# Allegro board pc049a_toplevel_03.brd
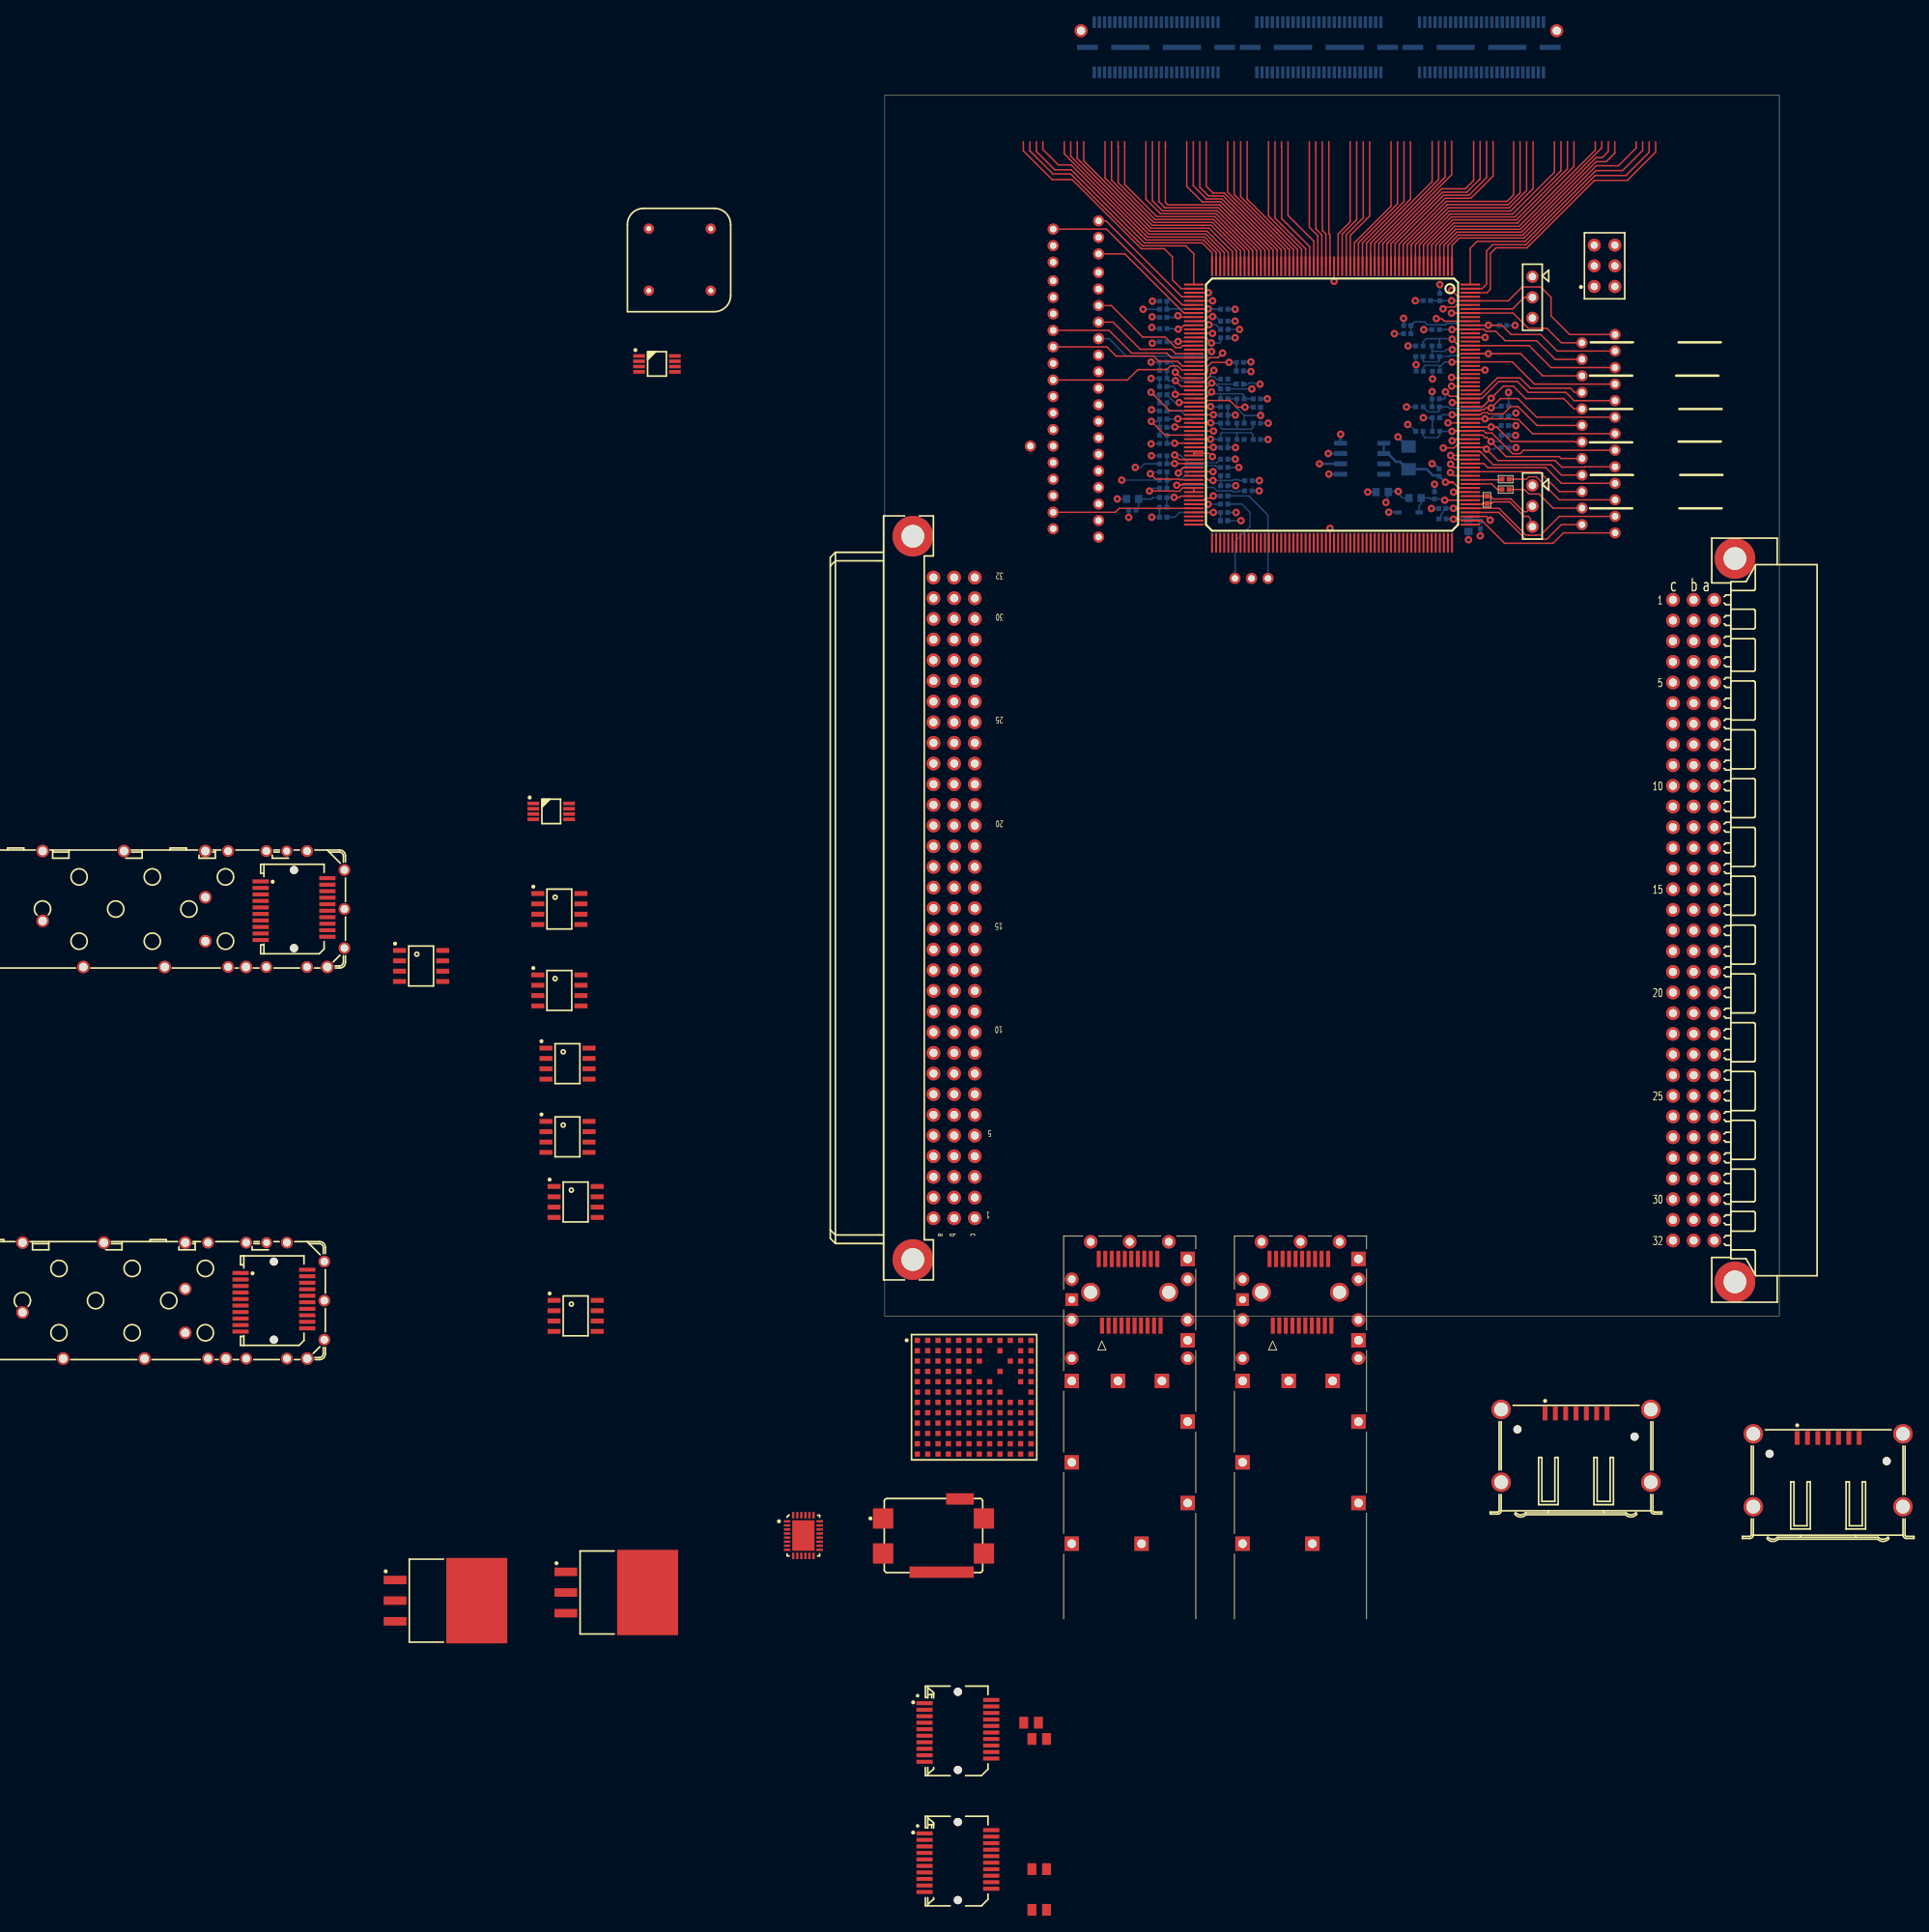
[diagram p0: board, top side]
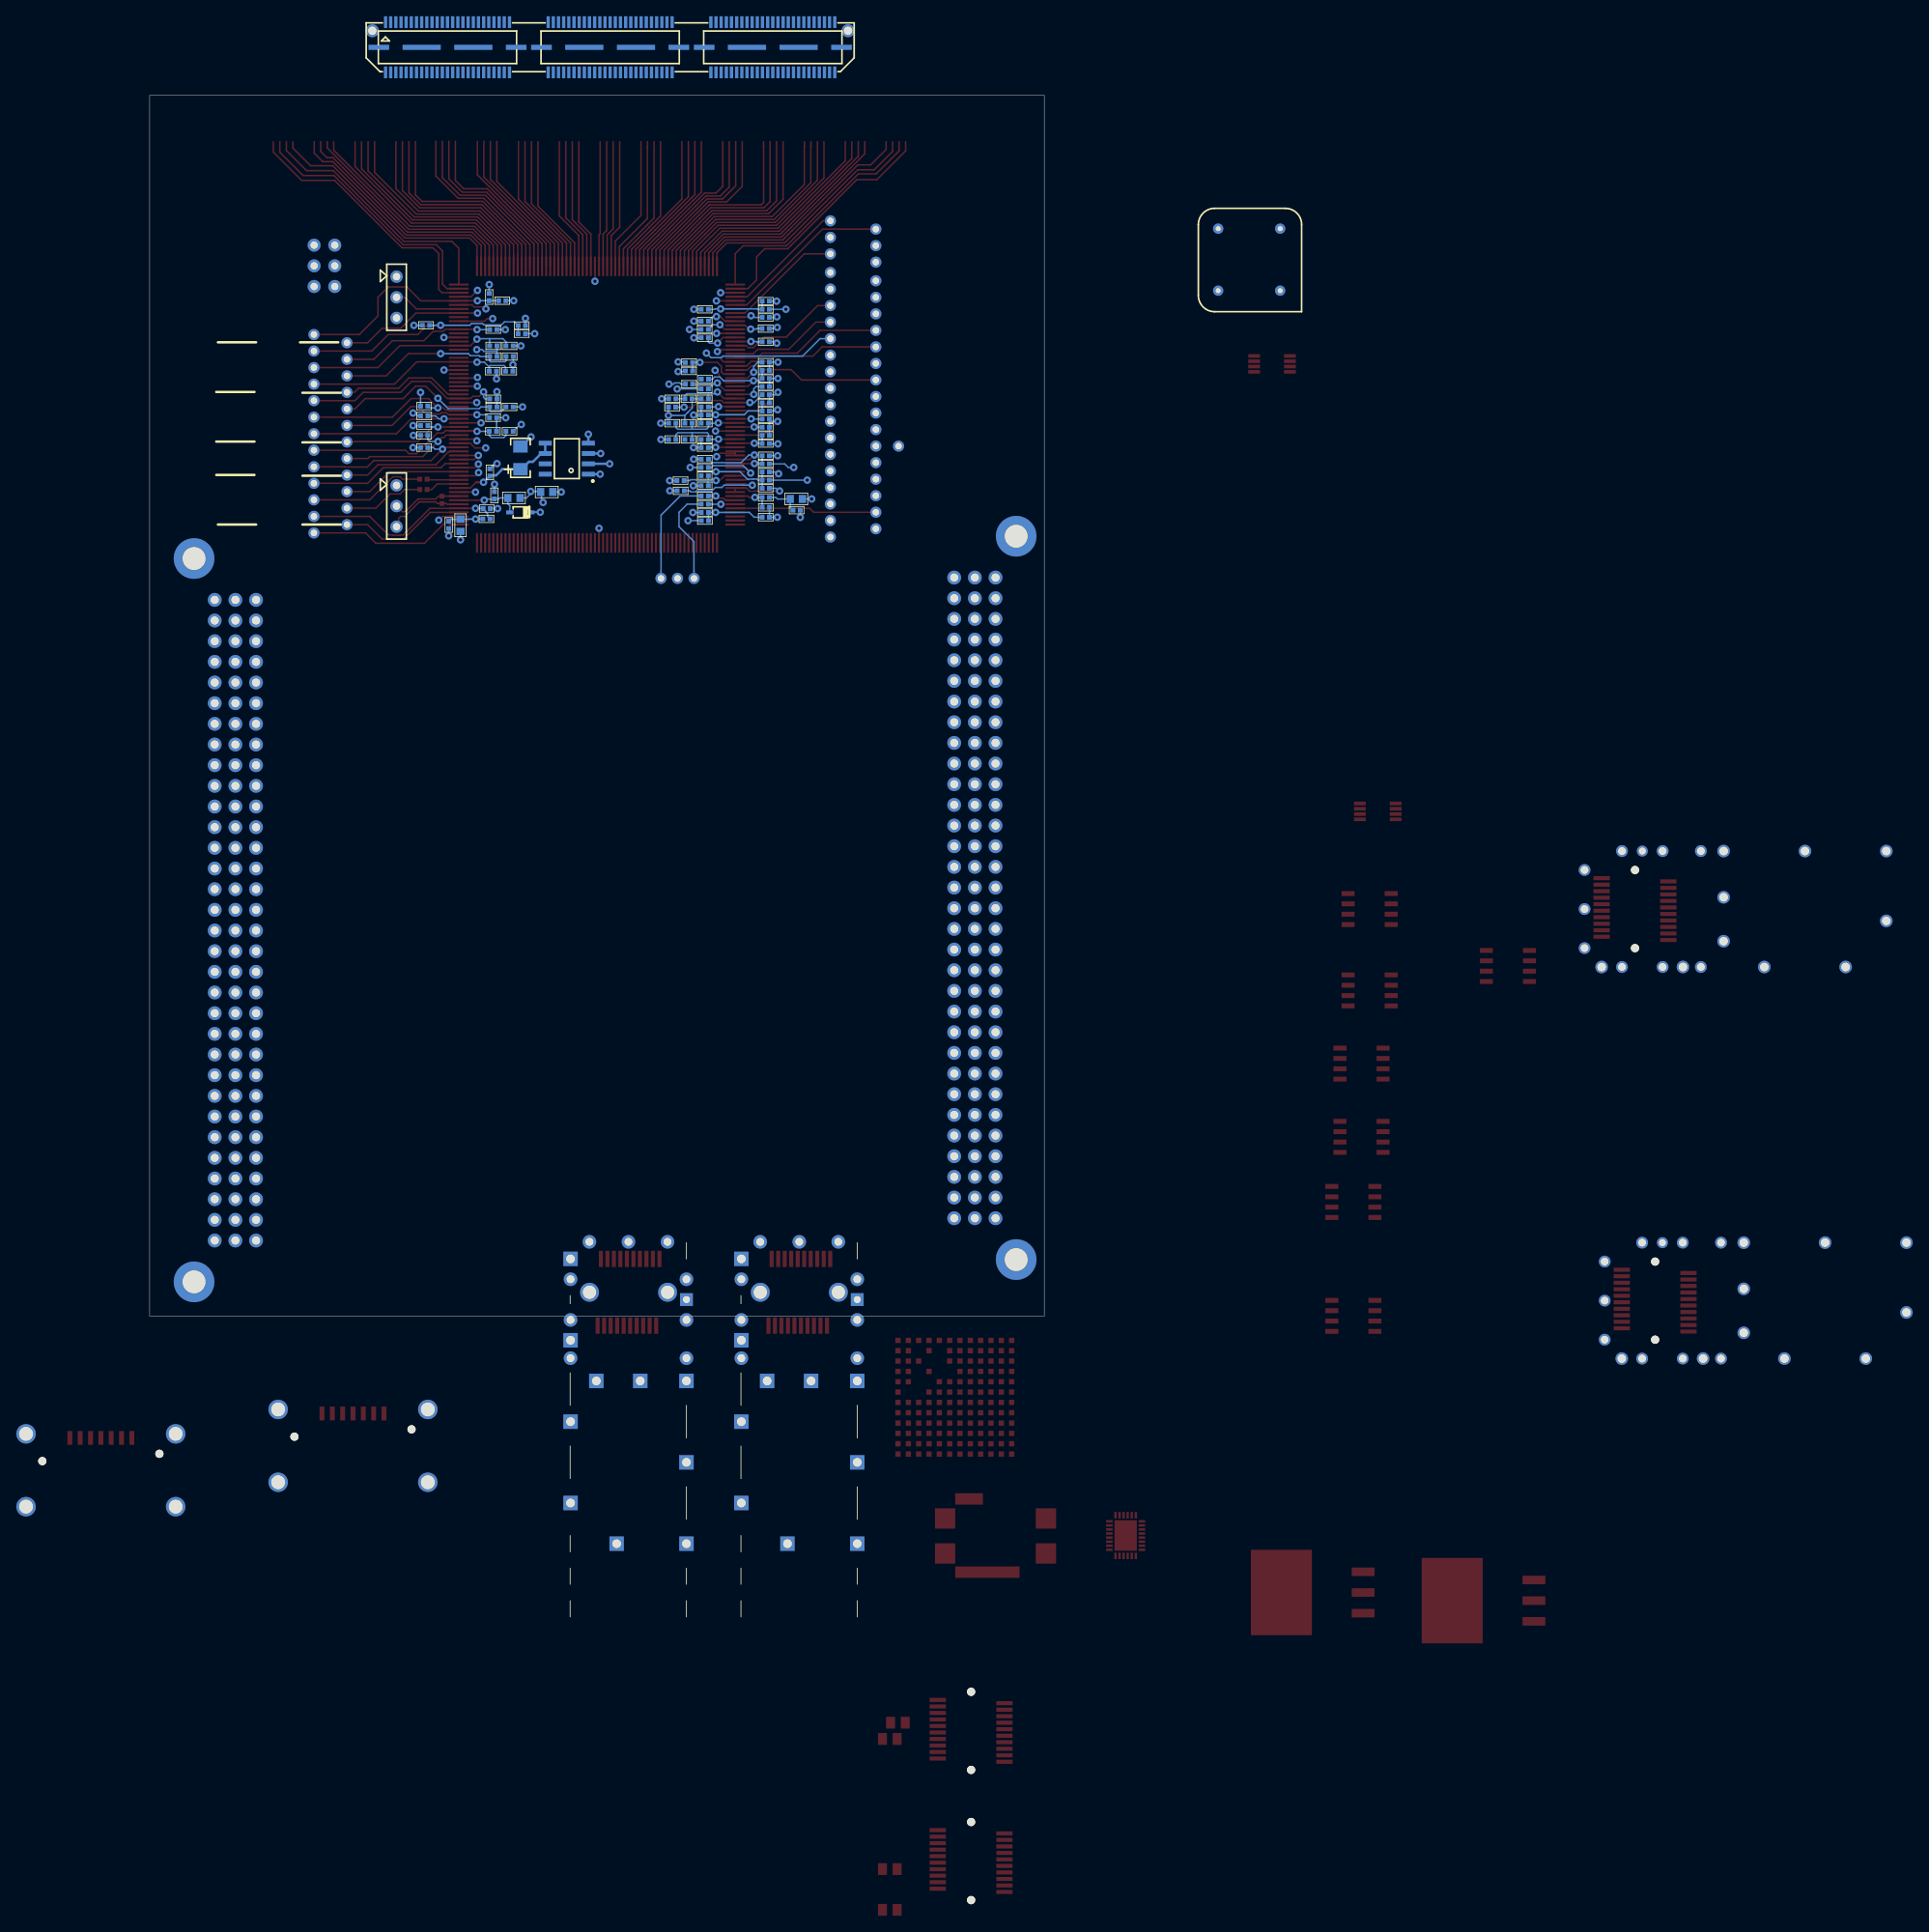
[diagram p1: board, bottom side, seen from below]

Outline 110 x 150 mm; copper layers: TOP, L2, L3, L4, L5, BOTTOM. Coordinates in mm from the lower left corner of the outline.
Outline path: 0,150 110,150 110,0 0,0 0,150

## Design rules (mm)
net group OR: nets OR<0>_1 OR<1>_1
net group ANALOG_TO_MAROC: nets ANALOG_TO_MAROC<0> ANALOG_TO_MAROC<1> ANALOG_TO_MAROC<2> ANALOG_TO_MAROC<3> ANALOG_TO_MAROC<4> ANALOG_TO_MAROC<5> ANALOG_TO_MAROC<6> ANALOG_TO_MAROC<7> ANALOG_TO_MAROC<8> ANALOG_TO_MAROC<9> ANALOG_TO_MAROC<10> ANALOG_TO_MAROC<11> ANALOG_TO_MAROC<12> ANALOG_TO_MAROC<13> ANALOG_TO_MAROC<14> ANALOG_TO_MAROC<15> ANALOG_TO_MAROC<16> ANALOG_TO_MAROC<17> ANALOG_TO_MAROC<18> ANALOG_TO_MAROC<19> ANALOG_TO_MAROC<20> ANALOG_TO_MAROC<21> ANALOG_TO_MAROC<22> ANALOG_TO_MAROC<23> ANALOG_TO_MAROC<24> ANALOG_TO_MAROC<25> ANALOG_TO_MAROC<26> ANALOG_TO_MAROC<27> ANALOG_TO_MAROC<28> ANALOG_TO_MAROC<29> ANALOG_TO_MAROC<30> ANALOG_TO_MAROC<31> ANALOG_TO_MAROC<32> ANALOG_TO_MAROC<33> ANALOG_TO_MAROC<34> ANALOG_TO_MAROC<35> ANALOG_TO_MAROC<36> ANALOG_TO_MAROC<37> ANALOG_TO_MAROC<38> ANALOG_TO_MAROC<39> ANALOG_TO_MAROC<40> ANALOG_TO_MAROC<41> ANALOG_TO_MAROC<42> ANALOG_TO_MAROC<43> ANALOG_TO_MAROC<44> ANALOG_TO_MAROC<45> ANALOG_TO_MAROC<46> ANALOG_TO_MAROC<47> ANALOG_TO_MAROC<48> ANALOG_TO_MAROC<49> ANALOG_TO_MAROC<50> ANALOG_TO_MAROC<51> ANALOG_TO_MAROC<52> ANALOG_TO_MAROC<53> ANALOG_TO_MAROC<54> ANALOG_TO_MAROC<55> ANALOG_TO_MAROC<56> ANALOG_TO_MAROC<57> ANALOG_TO_MAROC<58> ANALOG_TO_MAROC<59> ANALOG_TO_MAROC<60> ANALOG_TO_MAROC<61> ANALOG_TO_MAROC<62> ANALOG_TO_MAROC<63>
net group LVDS_DIN_N: nets LVDS_DIN_N<0> LVDS_DIN_N<1> LVDS_DIN_N<2> LVDS_DIN_N<3> LVDS_DIN_N<4> LVDS_DIN_N<5> LVDS_DIN_N<6> LVDS_DIN_N<7> LVDS_DIN_N<8> LVDS_DIN_N<9> LVDS_DIN_N<10> LVDS_DIN_N<11> LVDS_DIN_N<12> LVDS_DIN_N<13> LVDS_DIN_N<14> LVDS_DIN_N<15>
net group LVDS_DIN_P: nets LVDS_DIN_P<0> LVDS_DIN_P<1> LVDS_DIN_P<2> LVDS_DIN_P<3> LVDS_DIN_P<4> LVDS_DIN_P<5> LVDS_DIN_P<6> LVDS_DIN_P<7> LVDS_DIN_P<8> LVDS_DIN_P<9> LVDS_DIN_P<10> LVDS_DIN_P<11> LVDS_DIN_P<12> LVDS_DIN_P<13> LVDS_DIN_P<14> LVDS_DIN_P<15>
net group LVDS_DOUT_N: nets LVDS_DOUT_N<0> LVDS_DOUT_N<1> LVDS_DOUT_N<2> LVDS_DOUT_N<3> LVDS_DOUT_N<4> LVDS_DOUT_N<5> LVDS_DOUT_N<6> LVDS_DOUT_N<7> LVDS_DOUT_N<8> LVDS_DOUT_N<9> LVDS_DOUT_N<10> LVDS_DOUT_N<11> LVDS_DOUT_N<12> LVDS_DOUT_N<13> LVDS_DOUT_N<14> LVDS_DOUT_N<15>
net group LVDS_DOUT_P: nets LVDS_DOUT_P<0> LVDS_DOUT_P<1> LVDS_DOUT_P<2> LVDS_DOUT_P<3> LVDS_DOUT_P<4> LVDS_DOUT_P<5> LVDS_DOUT_P<6> LVDS_DOUT_P<7> LVDS_DOUT_P<8> LVDS_DOUT_P<9> LVDS_DOUT_P<10> LVDS_DOUT_P<11> LVDS_DOUT_P<12> LVDS_DOUT_P<13> LVDS_DOUT_P<14> LVDS_DOUT_P<15>
net group SUM: nets SUM<1>_1 SUM<2>_1 SUM<3>_1 SUM<4>_1 SUM<5>_1 SUM<6>_1 SUM<7>_1 SUM<8>_1
net group TRIG: nets TRIG<0>_1 TRIG<1>_1 TRIG<2>_1 TRIG<3>_1 TRIG<4>_1 TRIG<5>_1 TRIG<6>_1 TRIG<7>_1 TRIG<8>_1 TRIG<9>_1 TRIG<10>_1 TRIG<11>_1 TRIG<12>_1 TRIG<13>_1 TRIG<14>_1 TRIG<15>_1 TRIG<16>_1 TRIG<17>_1 TRIG<18>_1 TRIG<19>_1 TRIG<20>_1 TRIG<21>_1 TRIG<22>_1 TRIG<23>_1 TRIG<24>_1 TRIG<25>_1 TRIG<26>_1 TRIG<27>_1 TRIG<28>_1 TRIG<29>_1 TRIG<30>_1 TRIG<31>_1 TRIG<32>_1 TRIG<33>_1 TRIG<34>_1 TRIG<35>_1 TRIG<36>_1 TRIG<37>_1 TRIG<38>_1 TRIG<39>_1 TRIG<40>_1 TRIG<41>_1 TRIG<42>_1 TRIG<43>_1 TRIG<44>_1 TRIG<45>_1 TRIG<46>_1 TRIG<47>_1 TRIG<48>_1 TRIG<49>_1 TRIG<50>_1 TRIG<51>_1 TRIG<52>_1 TRIG<53>_1 TRIG<54>_1 TRIG<55>_1 TRIG<56>_1 TRIG<57>_1 TRIG<58>_1 TRIG<59>_1 TRIG<60>_1 TRIG<61>_1 TRIG<62>_1 TRIG<63>_1
net group UNNAMED_9_CAPCERSMDCL2_I30_B: nets UNNAMED_9_CAPCERSMDCL2_I30_B<0>
net group UNNAMED_9_FILTERBNX02_I5_CG: nets GND_SIGNAL
net group UNNAMED_9_LTM4606_I4_DRVCC: nets UNNAMED_9_LTM4606_I4_DRVCC<0>
net group UNNAMED_9_LTM4606_I4_SGND: nets DGND
net group UNNAMED_9_LTM4606_I4_VIN: nets P12V
net group UNNAMED_9_LTM4606_I4_VOUT: nets P1V5

## Placement (name value [footprint] x y rotation side)
C1_1  100nF  [C0402]  68.56 99.22 180 bottom
C2_1  100nF  [C0402]  34.24 99.37 0 bottom
C3_1  100nF  [C0402]  43.67 114.51 180 bottom
C4_1  100nF  [C0402]  68.25 125.21 270 bottom
C5_1  100nF  [C0402]  67.75 119.21 0 bottom
C6_1  100nF  [C0402]  34.25 124.71 0 bottom
C7_1  100nF  [C0402]  67.75 117.91 0 bottom
C8_1  100nF  [C0402]  34.25 123.71 0 bottom
C9_1  100nF  [C0402]  43.68 116.13 180 bottom
C10_1  100nF  [C0402]  67.8 116.1 0 bottom
C11_1  100nF  [C0402]  34.25 108.21 0 bottom
C12_1  100nF  [C0402]  67.75 111.71 0 bottom
C13_1  100nF  [C0402]  34.25 113.21 0 bottom
C14_1  100nF  [C0402]  34.25 105.71 0 bottom
C15_1  100nF  [C0402]  34.25 103.71 0 bottom
C16_1  100nF  [C0402]  67.79 108.72 0 bottom
C17_1  100nF  [C0402]  34.25 101.71 0 bottom
C18_1  100nF  [C0402]  34.25 122.71 0 bottom
C19_1  100nF  [C0402]  41.75 107.71 180 bottom
C20_1  100nF  [C0402]  34.25 119.71 0 bottom
C21_1  100nF  [C0402]  41.75 109.71 180 bottom
C22_1  100nF  [C0402]  34.25 114.21 0 bottom
C23_1  100nF  [C0402]  67.77 110.39 0 bottom
C24_1  100nF  [C0402]  34.25 116.21 0 bottom
C25_1  100nF  [C0402]  76.25 106.71 180 bottom
C26_1  100nF  [C0402]  34.25 109.21 0 bottom
C27_1  100nF  [C0402]  41.75 111.71 180 bottom
C28_1  100nF  [C0402]  41.75 120.21 180 bottom
C29_1  100nF  [C0402]  41.75 112.71 0 bottom
C30_1  100nF  [C0402]  41.75 104.27 180 bottom
C31_1  100nF  [C0402]  76.25 111.81 180 bottom
C32_1  100nF  [C0402]  41.75 122.26 180 bottom
C33_1  100nF  [C0402]  41.75 110.71 180 bottom
C34_1  100nF  [C0402]  44.73 102.65 180 bottom
C35_1  100nF  [C0402]  67.75 112.71 0 bottom
C36_1  100nF  [C0402]  41.76 121.23 180 bottom
C37_1  100nF  [C0402]  76.25 108.21 180 bottom
C38_1  100nF  [C0402]  76.02 121.74 180 bottom
C39_1  100nF  [C0402]  34.26 121.34 0 bottom
C40_1  100nF  [C0402]  34.25 117.21 0 bottom
C41_1  100nF  [C0402]  41.75 106.71 180 bottom
C42_1  100nF  [C0402]  76.24 110.6 180 bottom
C43_1  100nF  [C0402]  67.75 121.21 0 bottom
C44_1  100nF  [C0402]  41.74 98.74 180 bottom
C45_1  100nF  [C0402]  41.74 105.29 180 bottom
C46_1  100nF  [C0402]  76.24 109.42 180 bottom
C47_1  100nF  [C0402]  34.25 110.21 0 bottom
C48_1  22uF  [C3216POL]  64.41 104.05 90 bottom
C50_1  100nF  [C0402]  67.61 100.84 270 bottom
C51_1  100nF  [C0402]  68.17 103.66 270 bottom
C52_1  10uF  [C0603]  71.78 97.17 90 bottom
C53_1  10uF  [C0603]  30.49 100.4 0 bottom
C54_1  10uF  [C0603]  61.17 101.25 0 bottom
D1_1  -  [SOD323_INV]  64.41 98.75 180 bottom
IC1  -  [SOP65P490X95-8N]  -28 117 0 top
IC2  -  [SOIC127P600X175-8N]  -39 31 0 top
IC3  -  [SOIC127P600X175-8N]  -39 22 0 top
IC4  -  [SOIC127P600X175-8N]  -38 14 0 top
IC5  -  [SOIC127P600X175-8N]  -40 40 0 top
IC6  -  [SOIC127P600X175-8N]  -40 50 0 top
IC7  -  [SOIC127P600X175-8N]  -38 0 0 top
IC8  -  [SOIC127P600X175-8N]  -57 43 0 top
IC9  -  [SOP65P490X110-8N]  -41 62 0 top
IC10  -  [LGA133S127P12X12_05-08-1766]  11 -10 0 top
J1  -  [CON150_QTSDA]  81 159 90 bottom
J1_1  -  [SAMTEC_SSW-103-01-G-D]  88.51 129.05 270 top
J2  -  [HARTING_0903196X921]  102 88 0 top
J3  -  [HARTING_09732966801]  6 12 180 top
J3_1  -  [CONHE13D3X1M]  79.64 102.07 270 top
J4  -  [MOLEX_47082-001]  85 -12 0 top
J4_1  -  [CONHE13D3X1M]  79.64 127.72 270 top
J5  -  [MOLEX_47082-001]  116 -15 0 top
J6  -  [TYCO_1367073]  9 -51 0 top
J7  -  [TYCO_1367073]  9 -67 0 top
L1  -  [INDC2012X90N]  19 -52 0 top
L2  -  [INDC2012X90N]  18 -50 0 top
L3  -  [INDC2012X90N]  19 -68 0 top
L4  -  [INDC2012X90N]  19 -73 0 top
LC1  -  [MURATA_BNX02]  6 -27 0 top
LK1_1  -  [1-HOLE_0-8P]  89.8 98.26 0 top
LK2_1  -  [1-HOLE_0-8P]  26.3 99.78 0 top
LK3_1  -  [1-HOLE_0-8P]  20.71 123.15 0 top
LK4_1  -  [1-HOLE_0-8P]  89.8 120.61 0 top
LK5_1  -  [1-HOLE_0-8P]  89.8 116.55 0 top
LK6_1  -  [1-HOLE_0-8P]  85.74 119.6 0 top
LK7_1  -  [1-HOLE_0-8P]  85.74 115.53 0 top
LK8_1  -  [1-HOLE_0-8P]  20.71 125.18 0 top
LK9_1  -  [1-HOLE_0-8P]  89.8 114.52 0 top
LK10_1  -  [1-HOLE_0-8P]  85.74 111.47 0 top
LK11_1  -  [1-HOLE_0-8P]  20.71 112.99 0 top
LK12_1  -  [1-HOLE_0-8P]  26.3 105.88 0 top
LK13_1  -  [1-HOLE_0-8P]  89.8 106.39 0 top
LK14_1  -  [1-HOLE_0-8P]  20.71 102.83 0 top
LK15_1  -  [1-HOLE_0-8P]  26.3 97.75 0 top
LK16_1  -  [1-HOLE_0-8P]  26.3 128.23 0 top
LK17_1  -  [1-HOLE_0-8P]  20.71 104.86 0 top
LK18_1  -  [1-HOLE_0-8P]  26.3 126.2 0 top
LK19_1  -  [1-HOLE_0-8P]  26.3 107.91 0 top
LK20_1  -  [1-HOLE_0-8P]  26.3 114.01 0 top
LK21_1  -  [1-HOLE_0-8P]  85.74 109.44 0 top
LK22_1  -  [1-HOLE_0-8P]  20.71 117.06 0 top
LK23_1  -  [1-HOLE_0-8P]  89.8 104.36 0 top
LK24_1  -  [1-HOLE_0-8P]  20.71 108.93 0 top
LK25_1  -  [1-HOLE_0-8P]  26.3 111.98 0 top
LK26_1  -  [1-HOLE_0-8P]  89.8 96.23 0 top
LK27_1  -  [1-HOLE_0-8P]  20.71 106.9 0 top
LK28_1  -  [1-HOLE_0-8P]  89.8 102.32 0 top
LK29_1  -  [1-HOLE_0-8P]  85.74 101.31 0 top
LK30_1  -  [1-HOLE_0-8P]  17.92 106.9 0 top
LK31_1  -  [1-HOLE_0-8P]  20.71 129.5 0 top
LK32_1  -  [1-HOLE_0-8P]  26.3 116.04 0 top
LK33_1  -  [1-HOLE_0-8P]  26.3 101.82 0 top
LK34_1  -  [1-HOLE_0-8P]  89.8 110.45 0 top
LK35_1  -  [1-HOLE_0-8P]  26.3 132.55 0 top
LK36_1  -  [1-HOLE_0-8P]  20.71 110.96 0 top
LK37_1  -  [1-HOLE_0-8P]  20.71 96.74 0 top
LK38_1  -  [1-HOLE_0-8P]  89.8 112.48 0 top
LK39_1  -  [1-HOLE_0-8P]  20.71 131.53 0 top
LK40_1  -  [1-HOLE_0-8P]  85.74 105.37 0 top
LK41_1  -  [1-HOLE_0-8P]  89.8 118.58 0 top
LK42_1  -  [1-HOLE_0-8P]  20.71 127.22 0 top
LK43_1  -  [1-HOLE_0-8P]  26.3 118.07 0 top
LK44_1  -  [1-HOLE_0-8P]  20.71 100.8 0 top
LK45_1  -  [1-HOLE_0-8P]  89.8 108.42 0 top
LK46_1  -  [1-HOLE_0-8P]  85.74 117.56 0 top
LK47_1  -  [1-HOLE_0-8P]  26.3 95.72 0 top
LK48_1  -  [1-HOLE_0-8P]  26.3 103.85 0 top
LK49_1  -  [1-HOLE_0-8P]  85.74 107.4 0 top
LK50_1  -  [1-HOLE_0-8P]  26.3 109.94 0 top
LK51_1  -  [1-HOLE_0-8P]  85.74 99.28 0 top
LK52_1  -  [1-HOLE_0-8P]  89.8 100.29 0 top
LK53_1  -  [1-HOLE_0-8P]  26.3 120.1 0 top
LK54_1  -  [1-HOLE_0-8P]  43.07 90.64 0 top
LK55_1  -  [1-HOLE_0-8P]  45.1 90.64 0 top
LK56_1  -  [1-HOLE_0-8P]  47.13 90.64 0 top
LK57_1  -  [1-HOLE_0-8P]  26.3 130.52 0 top
LK58_1  -  [1-HOLE_0-8P]  85.74 113.5 0 top
LK59_1  -  [1-HOLE_0-8P]  20.71 98.77 0 top
LK60_1  -  [1-HOLE_0-8P]  26.3 134.58 0 top
LK61_1  -  [1-HOLE_0-8P]  26.3 124.17 0 top
LK62_1  -  [1-HOLE_0-8P]  20.71 121.12 0 top
LK63_1  -  [1-HOLE_0-8P]  85.74 103.34 0 top
LK64_1  -  [1-HOLE_0-8P]  26.3 122.14 0 top
LK65_1  -  [1-HOLE_0-8P]  20.71 119.09 0 top
LK66_1  -  [1-HOLE_0-8P]  20.71 133.57 0 top
LK67_1  -  [1-HOLE_0-8P]  20.71 115.02 0 top
LK68_1  -  [1-HOLE_0-8P]  85.74 97.24 0 top
QZ1  25MHz  [QZ_KTH039C]  -29 126 0 top
R1_1  51  [C0402]  76.34 101.56 0 top
R2_1  51  [C0402]  76.34 102.83 0 top
R3_1  10  [C0402]  68.59 97.95 180 bottom
R4_1  10  [C0402]  34.25 100.58 0 bottom
R5_1  10  [C0402]  41.75 113.92 0 bottom
R6_1  10  [C0402]  66.65 124.77 180 bottom
R7_1  10  [C0402]  65.75 119.21 180 bottom
R8_1  10  [C0402]  41.75 123.71 0 bottom
R9_1  10  [C0402]  65.74 117.91 180 bottom
R10_1  10  [C0402]  43.68 117.17 0 bottom
R11_1  10  [C0402]  65.79 116.1 180 bottom
R12_1  10  [C0402]  34.25 107.21 180 bottom
R13_1  10  [C0402]  65.75 111.71 180 bottom
R14_1  100  [C0402]  45.77 111.68 0 bottom
R15_1  10  [C0402]  34.25 104.71 180 bottom
R16_1  10  [C0402]  34.25 102.71 180 bottom
R17_1  100  [C0402]  65.75 108.71 180 bottom
R18_1  51  [C0402]  41.75 99.76 180 bottom
R19_1  51  [C0402]  41.75 100.77 180 bottom
R20_1  XX  [C0402]  43.75 107.71 0 bottom
R21_1  XX  [C0402]  45.75 107.71 180 bottom
R22_1  XX  [C0402]  43.75 109.71 0 bottom
R23_1  XX  [C0402]  45.75 109.71 180 bottom
R24_1  100  [C0402]  74.05 100.29 270 top
R25_1  XX  [C0402]  41.74 115.13 0 bottom
R26_1  XX  [C0402]  34.25 115.21 0 bottom
R27_1  1k  [C0402]  44.71 101.4 0 bottom
R28_1  XX  [C0402]  43.75 112.71 180 bottom
R29_1  XX  [C0402]  45.75 112.71 180 bottom
R30_1  XX  [C0402]  34.25 111.21 180 bottom
R31_1  XX  [C0402]  34.25 112.21 0 bottom
R32_1  XX  [C0402]  41.75 103.27 0 bottom
R33_1  XX  [C0402]  41.75 102.02 180 bottom
R34_1  XX  [C0402]  64.25 121.71 180 bottom
R35_1  XX  [C0402]  64.25 120.71 0 bottom
R36_1  XX  [C0402]  41.73 97.73 0 bottom
R37_1  XX  [C0402]  34.25 98.16 0 bottom
R42_1  82  [C0603]  65.21 100.52 180 bottom
R46_1  3.3  [C0402]  73.23 97.2 90 bottom
R47_1  3.3  [C0402]  30.46 99.02 0 bottom
RD  -  [unnamed#2]  -76 9 0 top
RD#2  -  [unnamed#3]  -85 50 0 top
REG1  -  [TO254P1435X460-4N]  -33 -34 0 top
REG2  -  [TO254P1435X460-4N]  -54 -35 0 top
RG1  -  [QFN50P400X500X80-29N-R375X275]  -10 -27 0 top
RG1_1  2.5V  [SOIC127P600X175-8N]  58.71 105.35 0 bottom
U1_1  -  [PQFP240_050]  69.75 128.99 270 top
UNK*  -  [unnamed]  44 2 90 top
UXXX  -  [unnamed]  23 2 90 top

## Library data of the parts
C1_1 C2_1 C3_1 C4_1 C5_1 C6_1 C7_1 C8_1 C9_1 C10_1 C11_1 C12_1 C13_1 C14_1 C15_1 C16_1 C17_1 C18_1 C19_1 C20_1 C21_1 C22_1 C23_1 C24_1 C25_1 C26_1 C27_1 C28_1 C29_1 C30_1 C31_1 C32_1 C33_1 C34_1 C35_1 C36_1 C37_1 C38_1 C39_1 C40_1 C41_1 C42_1 C43_1 C44_1 C45_1 C46_1 C47_1 C50_1 C51_1 = CAPCERSMDCL2: part number: CAPCERSMDCL2_0402-100NF,16V_GEN; tolerance: 10%
C48_1 = ELCAPTAN: part number: ELCAPTAN_SMD_A-22UF,6.3V
C52_1 C53_1 C54_1 = CAPCERSMDCL2: part number: CAPCERSMDCL2_0603-10UF_X5R,6.3V; tolerance: 5%
D1_1 = DIODE_CA: part number: DIODE_CA_SCHOTTKY-RB751V40T1
IC1 = AD5662: part number: AD5662BRMZ-1
IC2-IC4 = DS92001: part number: DS92001TMA
IC5-IC7 = DS90LV001: part number: DS90LV001TM
IC8 = 100EP05: part number: MC100EP05DG
IC9 = DS18B20: part number: DS18B20U+
IC10 = LTM4606: part number: LTM4606EV#PBF
J1 = CON150P: part number: CON150P-QTS75_03FDA
J1_1 = CON6P: part number: CON6P-SSW-103-01-G-D
J2 = CONABC96: part number: CONABC96-09 03 196 6921
J3 = CONABC96: part number: CONABC96-09 73 296 6801
J3_1 J4_1 = CON3P: part number: CON3P-SIL254D
J4 J5 = CON7P: part number: CON7P-47082-1000
J6 J7 = CON20P_SFP: part number: CON20P_SFP-1367073-1
L1-L4 = FERRITE: part number: FERRITE_C0805-LI0805H121R-10,LI0805H121R-10
LC1 = BNX02: part number: BNX022-01
LK1_1 LK2_1 LK3_1 LK4_1 LK5_1 LK6_1 LK7_1 LK8_1 LK9_1 LK10_1 LK11_1 LK12_1 LK13_1 LK14_1 LK15_1 LK16_1 LK17_1 LK18_1 LK19_1 LK20_1 LK21_1 LK22_1 LK23_1 LK24_1 LK25_1 LK26_1 LK27_1 LK28_1 LK29_1 LK30_1 LK31_1 LK32_1 LK33_1 LK34_1 LK35_1 LK36_1 LK37_1 LK38_1 LK39_1 LK40_1 LK41_1 LK42_1 LK43_1 LK44_1 LK45_1 LK46_1 LK47_1 LK48_1 LK49_1 LK50_1 LK51_1 LK52_1 LK53_1 LK54_1 LK55_1 LK56_1 LK57_1 LK58_1 LK59_1 LK60_1 LK61_1 LK62_1 LK63_1 LK64_1 LK65_1 LK66_1 LK67_1 LK68_1 = 1-HOLE: part number: 1-HOLE_0-8-BASE
QZ1 = OSCILQUARTZ: part number: OSCILQUARTZ-25MHZ
R1_1 R2_1 R18_1 R19_1 = RSMD0402: part number: RSMD0402_1/16W-51,1%; tolerance: 1%
R3_1 R4_1 R5_1 R6_1 R7_1 R8_1 R9_1 R10_1 R11_1 R12_1 R13_1 R15_1 R16_1 = RSMD0402: part number: RSMD0402_1/16W-10R,5%; tolerance: 5%
R14_1 R17_1 = RSMD0402: part number: RSMD0402_1/16W-100,0.1%_GEN; tolerance: 0.1%
R20_1 R21_1 R22_1 R23_1 R25_1 R26_1 R28_1 R29_1 R30_1 R31_1 R32_1 R33_1 R34_1 R35_1 R36_1 R37_1 = RSMD0402: part number: RSMD0402_0.0625W-XX,1%; tolerance: 1%
R24_1 = RSMD0402: part number: RSMD0402_1/16W-100,1%; tolerance: 1%
R27_1 = RSMD0402: part number: RSMD0402_1/16W-1K,5%; tolerance: 5%
R42_1 = RSMD0603: part number: RSMD0603_1/10W-82,1%; tolerance: 1%
R46_1 R47_1 = RSMD0402: part number: RSMD0402_1/16W-3.3R,5%; tolerance: 5%
REG1 = LM1084: part number: LM1084IS-3.3
REG2 = LM1084: part number: LM1084IS-ADJ
RG1 = LT3070: part number: LT3070EUFD#PBF
RG1_1 = TPS776XX: part number: TPS77625D
U1_1 = MAROC3: part number: MAROC3_PQFP-IN2P3

## Footprints (pads in the part's own frame, mm; a bottom-side part is the same pattern mirrored in y, then rotated)
1-HOLE_0-8P
  round 1.372 hole 0.813: 1(0,0)
C0402
  rect 0.6x0.6 smd: 1(-0.45,0) 2(0.45,0)
C0603
  rect 0.9x1 smd: 1(-0.75,0) 2(0.75,0)
C3216POL
  rect 1.524x1.778 smd: 1(0,0) 2(2.8,0)
CON150_QTSDA
  round 1.6 hole 1.016: (-1.054,-56.861) (-1.054,1.622)
  rect 1.448x0.406 smd: 1(0,0) 2(-6.17,0) 3(0,-0.635) 4(-6.17,-0.635) 5(0,-1.27) 6(-6.17,-1.27) 7(0,-1.905) 8(-6.17,-1.905) 9(0,-2.54) 10(-6.17,-2.54) 11(0,-3.175) 12(-6.17,-3.175) 13(0,-3.81) 14(-6.17,-3.81) 15(0,-4.445) 16(-6.17,-4.445) 17(0,-5.08) 18(-6.17,-5.08) 19(0,-5.715) 20(-6.17,-5.715) 21(0,-6.35) 22(-6.17,-6.35) 23(0,-6.985) 24(-6.17,-6.985) 25(0,-7.62) 26(-6.17,-7.62) 27(0,-8.255) 28(-6.17,-8.255) 29(0,-8.89) 30(-6.17,-8.89) 31(0,-9.525) 32(-6.17,-9.525) 33(0,-10.16) 34(-6.17,-10.16) 35(0,-10.795) 36(-6.17,-10.795) 37(0,-11.43) 38(-6.17,-11.43) 39(0,-12.065) 40(-6.17,-12.065) 41(0,-12.7) 42(-6.17,-12.7) 43(0,-13.335) 44(-6.17,-13.335) 45(0,-13.97) 46(-6.17,-13.97) 47(0,-14.605) 48(-6.17,-14.605) 49(0,-15.24) 50(-6.17,-15.24) 51(0,-20) 52(-6.17,-20) 53(0,-20.635) 54(-6.17,-20.635) 55(0,-21.27) 56(-6.17,-21.27) 57(0,-21.905) 58(-6.17,-21.905) 59(0,-22.54) 60(-6.17,-22.54) 61(0,-23.175) 62(-6.17,-23.175) 63(0,-23.81) 64(-6.17,-23.81) 65(0,-24.445) 66(-6.17,-24.445) 67(0,-25.08) 68(-6.17,-25.08) 69(0,-25.715) 70(-6.17,-25.715) 71(0,-26.35) 72(-6.17,-26.35) 73(0,-26.985) 74(-6.17,-26.985) 75(0,-27.62) 76(-6.17,-27.62) 77(0,-28.255) 78(-6.17,-28.255) 79(0,-28.89) 80(-6.17,-28.89) 81(0,-29.525) 82(-6.17,-29.525) 83(0,-30.16) 84(-6.17,-30.16) 85(0,-30.795) 86(-6.17,-30.795) 87(0,-31.43) 88(-6.17,-31.43) 89(0,-32.065) 90(-6.17,-32.065) 91(0,-32.7) 92(-6.17,-32.7) 93(0,-33.335) 94(-6.17,-33.335) 95(0,-33.97) 96(-6.17,-33.97) 97(0,-34.605) 98(-6.17,-34.605) 99(0,-35.24) 100(-6.17,-35.24) 101(0,-40) 102(-6.17,-40) 103(0,-40.635) 104(-6.17,-40.635) 105(0,-41.27) 106(-6.17,-41.27) 107(0,-41.905) 108(-6.17,-41.905) 109(0,-42.54) 110(-6.17,-42.54) 111(0,-43.175) 112(-6.17,-43.175) 113(0,-43.81) 114(-6.17,-43.81) 115(0,-44.445) 116(-6.17,-44.445) 117(0,-45.08) 118(-6.17,-45.08) 119(0,-45.715) 120(-6.17,-45.715) 121(0,-46.35) 122(-6.17,-46.35) 123(0,-46.985) 124(-6.17,-46.985) 125(0,-47.62) 126(-6.17,-47.62) 127(0,-48.255) 128(-6.17,-48.255) 129(0,-48.89) 130(-6.17,-48.89) 131(0,-49.525) 132(-6.17,-49.525) 133(0,-50.16) 134(-6.17,-50.16) 135(0,-50.795) 136(-6.17,-50.795) 137(0,-51.43) 138(-6.17,-51.43) 139(0,-52.065) 140(-6.17,-52.065) 141(0,-52.7) 142(-6.17,-52.7) 143(0,-53.335) 144(-6.17,-53.335) 145(0,-53.97) 146(-6.17,-53.97) 147(0,-54.605) 148(-6.17,-54.605) 149(0,-55.24) 150(-6.17,-55.24)
  rect 0.635x2.54 smd: 151(-3.086,0.826) 154(-3.086,-16.066) 155(-3.086,-19.174) 158(-3.086,-36.066) 159(-3.086,-39.174) 162(-3.086,-56.066)
  rect 0.635x4.699 smd: 152(-3.086,-4.445) 153(-3.086,-10.795) 156(-3.086,-24.445) 157(-3.086,-30.795) 160(-3.086,-44.445) 161(-3.086,-50.795)
CONHE13D3X1M
  round 1.524 hole 0.914: 1(0,0) 2(2.54,0) 3(5.08,0)
HARTING_0903196X921
  round 5 hole 2.8: 1(2.54,5.08) 2(2.54,-83.82)
  round 1.7 hole 1: A1(0,0) A2(0,-2.54) A3(0,-5.08) A4(0,-7.62) A5(0,-10.16) A6(0,-12.7) A7(0,-15.24) A8(0,-17.78) A9(0,-20.32) A10(0,-22.86) A11(0,-25.4) A12(0,-27.94) A13(0,-30.48) A14(0,-33.02) A15(0,-35.56) A16(0,-38.1) A17(0,-40.64) A18(0,-43.18) A19(0,-45.72) A20(0,-48.26) A21(0,-50.8) A22(0,-53.34) A23(0,-55.88) A24(0,-58.42) A25(0,-60.96) A26(0,-63.5) A27(0,-66.04) A28(0,-68.58) A29(0,-71.12) A30(0,-73.66) A31(0,-76.2) A32(0,-78.74) B1(-2.54,0) B2(-2.54,-2.54) B3(-2.54,-5.08) B4(-2.54,-7.62) B5(-2.54,-10.16) B6(-2.54,-12.7) B7(-2.54,-15.24) B8(-2.54,-17.78) B9(-2.54,-20.32) B10(-2.54,-22.86) B11(-2.54,-25.4) B12(-2.54,-27.94) B13(-2.54,-30.48) B14(-2.54,-33.02) B15(-2.54,-35.56) B16(-2.54,-38.1) B17(-2.54,-40.64) B18(-2.54,-43.18) B19(-2.54,-45.72) B20(-2.54,-48.26) B21(-2.54,-50.8) B22(-2.54,-53.34) B23(-2.54,-55.88) B24(-2.54,-58.42) B25(-2.54,-60.96) B26(-2.54,-63.5) B27(-2.54,-66.04) B28(-2.54,-68.58) B29(-2.54,-71.12) B30(-2.54,-73.66) B31(-2.54,-76.2) B32(-2.54,-78.74) C1(-5.08,0) C2(-5.08,-2.54) C3(-5.08,-5.08) C4(-5.08,-7.62) C5(-5.08,-10.16) C6(-5.08,-12.7) C7(-5.08,-15.24) C8(-5.08,-17.78) C9(-5.08,-20.32) C10(-5.08,-22.86) C11(-5.08,-25.4) C12(-5.08,-27.94) C13(-5.08,-30.48) C14(-5.08,-33.02) C15(-5.08,-35.56) C16(-5.08,-38.1) C17(-5.08,-40.64) C18(-5.08,-43.18) C19(-5.08,-45.72) C20(-5.08,-48.26) C21(-5.08,-50.8) C22(-5.08,-53.34) C23(-5.08,-55.88) C24(-5.08,-58.42) C25(-5.08,-60.96) C26(-5.08,-63.5) C27(-5.08,-66.04) C28(-5.08,-68.58) C29(-5.08,-71.12) C30(-5.08,-73.66) C31(-5.08,-76.2) C32(-5.08,-78.74)
HARTING_09732966801
  round 5 hole 2.8: 1(2.54,5.08) 2(2.54,-83.82)
  round 1.7 hole 1: A1(0,0) A2(0,-2.54) A3(0,-5.08) A4(0,-7.62) A5(0,-10.16) A6(0,-12.7) A7(0,-15.24) A8(0,-17.78) A9(0,-20.32) A10(0,-22.86) A11(0,-25.4) A12(0,-27.94) A13(0,-30.48) A14(0,-33.02) A15(0,-35.56) A16(0,-38.1) A17(0,-40.64) A18(0,-43.18) A19(0,-45.72) A20(0,-48.26) A21(0,-50.8) A22(0,-53.34) A23(0,-55.88) A24(0,-58.42) A25(0,-60.96) A26(0,-63.5) A27(0,-66.04) A28(0,-68.58) A29(0,-71.12) A30(0,-73.66) A31(0,-76.2) A32(0,-78.74) B1(-2.54,0) B2(-2.54,-2.54) B3(-2.54,-5.08) B4(-2.54,-7.62) B5(-2.54,-10.16) B6(-2.54,-12.7) B7(-2.54,-15.24) B8(-2.54,-17.78) B9(-2.54,-20.32) B10(-2.54,-22.86) B11(-2.54,-25.4) B12(-2.54,-27.94) B13(-2.54,-30.48) B14(-2.54,-33.02) B15(-2.54,-35.56) B16(-2.54,-38.1) B17(-2.54,-40.64) B18(-2.54,-43.18) B19(-2.54,-45.72) B20(-2.54,-48.26) B21(-2.54,-50.8) B22(-2.54,-53.34) B23(-2.54,-55.88) B24(-2.54,-58.42) B25(-2.54,-60.96) B26(-2.54,-63.5) B27(-2.54,-66.04) B28(-2.54,-68.58) B29(-2.54,-71.12) B30(-2.54,-73.66) B31(-2.54,-76.2) B32(-2.54,-78.74) C1(-5.08,0) C2(-5.08,-2.54) C3(-5.08,-5.08) C4(-5.08,-7.62) C5(-5.08,-10.16) C6(-5.08,-12.7) C7(-5.08,-15.24) C8(-5.08,-17.78) C9(-5.08,-20.32) C10(-5.08,-22.86) C11(-5.08,-25.4) C12(-5.08,-27.94) C13(-5.08,-30.48) C14(-5.08,-33.02) C15(-5.08,-35.56) C16(-5.08,-38.1) C17(-5.08,-40.64) C18(-5.08,-43.18) C19(-5.08,-45.72) C20(-5.08,-48.26) C21(-5.08,-50.8) C22(-5.08,-53.34) C23(-5.08,-55.88) C24(-5.08,-58.42) C25(-5.08,-60.96) C26(-5.08,-63.5) C27(-5.08,-66.04) C28(-5.08,-68.58) C29(-5.08,-71.12) C30(-5.08,-73.66) C31(-5.08,-76.2) C32(-5.08,-78.74)
INDC2012X90N
  rect 1.1x1.45 smd: 1(-0.9,0) 2(0.9,0)
LGA133S127P12X12_05-08-1766
  rect 0.65x0.65 smd: A1(-6.985,6.985) A2(-5.715,6.985) A3(-4.445,6.985) A4(-3.175,6.985) A5(-1.905,6.985) A6(-0.635,6.985) A7(0.635,6.985) A8(1.905,6.985) A9(3.175,6.985) A10(4.445,6.985) A11(5.715,6.985) A12(6.985,6.985) B1(-6.985,5.715) B2(-5.715,5.715) B3(-4.445,5.715) B4(-3.175,5.715) B5(-1.905,5.715) B6(-0.635,5.715) B7(0.635,5.715) B9(3.175,5.715) B11(5.715,5.715) B12(6.985,5.715) C1(-6.985,4.445) C2(-5.715,4.445) C3(-4.445,4.445) C4(-3.175,4.445) C5(-1.905,4.445) C6(-0.635,4.445) C7(0.635,4.445) C10(4.445,4.445) C11(5.715,4.445) C12(6.985,4.445) D1(-6.985,3.175) D2(-5.715,3.175) D3(-4.445,3.175) D4(-3.175,3.175) D5(-1.905,3.175) D6(-0.635,3.175) D9(3.175,3.175) D11(5.715,3.175) D12(6.985,3.175) E1(-6.985,1.905) E2(-5.715,1.905) E3(-4.445,1.905) E4(-3.175,1.905) E5(-1.905,1.905) E6(-0.635,1.905) E7(0.635,1.905) E8(1.905,1.905) E11(5.715,1.905) E12(6.985,1.905) F1(-6.985,0.635) F2(-5.715,0.635) F3(-4.445,0.635) F4(-3.175,0.635) F5(-1.905,0.635) F6(-0.635,0.635) F7(0.635,0.635) F8(1.905,0.635) F9(3.175,0.635) F12(6.985,0.635) G1(-6.985,-0.635) G2(-5.715,-0.635) G3(-4.445,-0.635) G4(-3.175,-0.635) G5(-1.905,-0.635) G6(-0.635,-0.635) G7(0.635,-0.635) G8(1.905,-0.635) G9(3.175,-0.635) G10(4.445,-0.635) G11(5.715,-0.635) G12(6.985,-0.635) H1(-6.985,-1.905) H2(-5.715,-1.905) H3(-4.445,-1.905) H4(-3.175,-1.905) H5(-1.905,-1.905) H6(-0.635,-1.905) H7(0.635,-1.905) H8(1.905,-1.905) H9(3.175,-1.905) H10(4.445,-1.905) H11(5.715,-1.905) H12(6.985,-1.905) J1(-6.985,-3.175) J2(-5.715,-3.175) J3(-4.445,-3.175) J4(-3.175,-3.175) J5(-1.905,-3.175) J6(-0.635,-3.175) J7(0.635,-3.175) J8(1.905,-3.175) J9(3.175,-3.175) J10(4.445,-3.175) J11(5.715,-3.175) J12(6.985,-3.175) K1(-6.985,-4.445) K2(-5.715,-4.445) K3(-4.445,-4.445) K4(-3.175,-4.445) K5(-1.905,-4.445) K6(-0.635,-4.445) K7(0.635,-4.445) K8(1.905,-4.445) K9(3.175,-4.445) K10(4.445,-4.445) K11(5.715,-4.445) K12(6.985,-4.445) L1(-6.985,-5.715) L2(-5.715,-5.715) L3(-4.445,-5.715) L4(-3.175,-5.715) L5(-1.905,-5.715) L6(-0.635,-5.715) L7(0.635,-5.715) L8(1.905,-5.715) L9(3.175,-5.715) L10(4.445,-5.715) L11(5.715,-5.715) L12(6.985,-5.715) M1(-6.985,-6.985) M2(-5.715,-6.985) M3(-4.445,-6.985) M4(-3.175,-6.985) M5(-1.905,-6.985) M6(-0.635,-6.985) M7(0.635,-6.985) M8(1.905,-6.985) M9(3.175,-6.985) M10(4.445,-6.985) M11(5.715,-6.985) M12(6.985,-6.985)
MOLEX_47082-001
  round 1 hole 1.4 unplated: (-7.2,-1.95)
  round 1 hole 1.7 unplated: (7.2,-2.85)
  rect 0.6x1.7 smd: 1(-3.81,0) 2(-2.54,0) 3(-1.27,0) 4(0,0) 5(1.27,0) 6(2.54,0) 7(3.81,0)
  round 2.4 hole 1.7: 8(-9.2,0.5) 9(9.2,0.5) 10(-9.2,-8.45) 11(9.2,-8.45)
MURATA_BNX02
  rect 2.5x2.5 smd: 1(-6.2,2.1) 2(6.2,2.1) 3(-6.2,-2.2) 4(6.2,-2.2)
  rect 3.4x1.4 smd: 5(3.25,4.5)
  rect 7.9x1.4 smd: 6(1,-4.5)
PQFP240_050
  rect 2.413x0.254 smd: 1(0,0) 2(0,-0.5) 3(0,-1) 4(0,-1.5) 5(0,-2) 6(0,-2.5) 7(0,-3) 8(0,-3.5) 9(0,-4) 10(0,-4.5) 11(0,-5) 12(0,-5.5) 13(0,-6) 14(0,-6.5) 15(0,-7) 16(0,-7.5) 17(0,-8) 18(0,-8.5) 19(0,-9) 20(0,-9.5) 21(0,-10) 22(0,-10.5) 23(0,-11) 24(0,-11.5) 25(0,-12) 26(0,-12.5) 27(0,-13) 28(0,-13.5) 29(0,-14) 30(0,-14.5) 31(0,-15) 32(0,-15.5) 33(0,-16) 34(0,-16.5) 35(0,-17) 36(0,-17.5) 37(0,-18) 38(0,-18.5) 39(0,-19) 40(0,-19.5) 41(0,-20) 42(0,-20.5) 43(0,-21) 44(0,-21.5) 45(0,-22) 46(0,-22.5) 47(0,-23) 48(0,-23.5) 49(0,-24) 50(0,-24.5) 51(0,-25) 52(0,-25.5) 53(0,-26) 54(0,-26.5) 55(0,-27) 56(0,-27.5) 57(0,-28) 58(0,-28.5) 59(0,-29) 60(0,-29.5) 121(33.987,-29.5) 122(33.987,-29) 123(33.987,-28.5) 124(33.987,-28) 125(33.987,-27.5) 126(33.987,-27) 127(33.987,-26.5) 128(33.987,-26) 129(33.987,-25.5) 130(33.987,-25) 131(33.987,-24.5) 132(33.987,-24) 133(33.987,-23.5) 134(33.987,-23) 135(33.987,-22.5) 136(33.987,-22) 137(33.987,-21.5) 138(33.987,-21) 139(33.987,-20.5) 140(33.987,-20) 141(33.987,-19.5) 142(33.987,-19) 143(33.987,-18.5) 144(33.987,-18) 145(33.987,-17.5) 146(33.987,-17) 147(33.987,-16.5) 148(33.987,-16) 149(33.987,-15.5) 150(33.987,-15) 151(33.987,-14.5) 152(33.987,-14) 153(33.987,-13.5) 154(33.987,-13) 155(33.987,-12.5) 156(33.987,-12) 157(33.987,-11.5) 158(33.987,-11) 159(33.987,-10.5) 160(33.987,-10) 161(33.987,-9.5) 162(33.987,-9) 163(33.987,-8.5) 164(33.987,-8) 165(33.987,-7.5) 166(33.987,-7) 167(33.987,-6.5) 168(33.987,-6) 169(33.987,-5.5) 170(33.987,-5) 171(33.987,-4.5) 172(33.987,-4) 173(33.987,-3.5) 174(33.987,-3) 175(33.987,-2.5) 176(33.987,-2) 177(33.987,-1.5) 178(33.987,-1) 179(33.987,-0.5) 180(33.987,0)
  rect 0.254x2.413 smd: 61(2.244,-31.744) 62(2.744,-31.744) 63(3.244,-31.744) 64(3.744,-31.744) 65(4.244,-31.744) 66(4.744,-31.744) 67(5.244,-31.744) 68(5.744,-31.744) 69(6.244,-31.744) 70(6.744,-31.744) 71(7.244,-31.744) 72(7.744,-31.744) 73(8.243,-31.744) 74(8.743,-31.744) 75(9.243,-31.744) 76(9.743,-31.744) 77(10.243,-31.744) 78(10.743,-31.744) 79(11.243,-31.744) 80(11.743,-31.744) 81(12.243,-31.744) 82(12.743,-31.744) 83(13.243,-31.744) 84(13.743,-31.744) 85(14.243,-31.744) 86(14.743,-31.744) 87(15.243,-31.744) 88(15.743,-31.744) 89(16.244,-31.744) 90(16.744,-31.744) 91(17.244,-31.744) 92(17.744,-31.744) 93(18.244,-31.744) 94(18.744,-31.744) 95(19.244,-31.744) 96(19.744,-31.744) 97(20.244,-31.744) 98(20.744,-31.744) 99(21.244,-31.744) 100(21.744,-31.744) 101(22.244,-31.744) 102(22.744,-31.744) 103(23.244,-31.744) 104(23.744,-31.744) 105(24.244,-31.744) 106(24.744,-31.744) 107(25.244,-31.744) 108(25.744,-31.744) 109(26.244,-31.744) 110(26.744,-31.744) 111(27.244,-31.744) 112(27.744,-31.744) 113(28.244,-31.744) 114(28.744,-31.744) 115(29.244,-31.744) 116(29.744,-31.744) 117(30.244,-31.744) 118(30.744,-31.744) 119(31.244,-31.744) 120(31.744,-31.744) 181(31.744,2.244) 182(31.244,2.244) 183(30.744,2.244) 184(30.244,2.244) 185(29.744,2.244) 186(29.244,2.244) 187(28.744,2.244) 188(28.244,2.244) 189(27.744,2.244) 190(27.244,2.244) 191(26.744,2.244) 192(26.244,2.244) 193(25.744,2.244) 194(25.244,2.244) 195(24.744,2.244) 196(24.244,2.244) 197(23.744,2.244) 198(23.244,2.244) 199(22.744,2.244) 200(22.244,2.244) 201(21.744,2.244) 202(21.244,2.244) 203(20.744,2.244) 204(20.244,2.244) 205(19.744,2.244) 206(19.244,2.244) 207(18.744,2.244) 208(18.244,2.244) 209(17.744,2.244) 210(17.244,2.244) 211(16.744,2.244) 212(16.244,2.244) 213(15.743,2.244) 214(15.243,2.244) 215(14.743,2.244) 216(14.243,2.244) 217(13.743,2.244) 218(13.243,2.244) 219(12.743,2.244) 220(12.243,2.244) 221(11.743,2.244) 222(11.243,2.244) 223(10.743,2.244) 224(10.243,2.244) 225(9.743,2.244) 226(9.243,2.244) 227(8.743,2.244) 228(8.243,2.244) 229(7.744,2.244) 230(7.244,2.244) 231(6.744,2.244) 232(6.244,2.244) 233(5.744,2.244) 234(5.244,2.244) 235(4.744,2.244) 236(4.244,2.244) 237(3.744,2.244) 238(3.244,2.244) 239(2.744,2.244) 240(2.244,2.244)
QFN50P400X500X80-29N-R375X275
  rect 0.8x0.3 smd: 1(-2,1.75) 2(-2,1.25) 3(-2,0.75) 4(-2,0.25) 5(-2,-0.25) 6(-2,-0.75) 7(-2,-1.25) 8(-2,-1.75) 15(2,-1.75) 16(2,-1.25) 17(2,-0.75) 18(2,-0.25) 19(2,0.25) 20(2,0.75) 21(2,1.25) 22(2,1.75)
  rect 0.3x0.8 smd: 9(-1.25,-2.5) 10(-0.75,-2.5) 11(-0.25,-2.5) 12(0.25,-2.5) 13(0.75,-2.5) 14(1.25,-2.5) 23(1.25,2.5) 24(0.75,2.5) 25(0.25,2.5) 26(-0.25,2.5) 27(-0.75,2.5) 28(-1.25,2.5)
  rect 2.75x3.75 smd: 29(0,0)
QZ_KTH039C
  round 1.27 hole 0.61: 1(0,0) 4(7.62,0) 5(7.62,7.62) 8(0,7.62)
SAMTEC_SSW-103-01-G-D
  round 1.6 hole 0.9: 1(2.54,-1.27) 2(2.54,1.27) 3(0,-1.27) 4(0,1.27) 5(-2.54,-1.27) 6(-2.54,1.27)
SOD323_INV
  rect 0.9x0.5 smd: 1(1.3,0) 2(-1.3,0)
SOIC127P600X175-8N
  rect 1.6x0.6 smd: 1(-2.65,1.905) 2(-2.65,0.635) 3(-2.65,-0.635) 4(-2.65,-1.905) 5(2.65,-1.905) 6(2.65,-0.635) 7(2.65,0.635) 8(2.65,1.905)
SOP65P490X95-8N
  rect 1.45x0.45 smd: 1(-2.2,0.975) 2(-2.2,0.325) 3(-2.2,-0.325) 4(-2.2,-0.975) 5(2.2,-0.975) 6(2.2,-0.325) 7(2.2,0.325) 8(2.2,0.975)
SOP65P490X110-8N
  rect 1.45x0.45 smd: 1(-2.2,0.975) 2(-2.2,0.325) 3(-2.2,-0.325) 4(-2.2,-0.975) 5(2.2,-0.975) 6(2.2,-0.325) 7(2.2,0.325) 8(2.2,0.975)
TO254P1435X460-4N
  rect 2.8x1.05 smd: 1(-6.2,2.54) 2(-6.2,0) 3(-6.2,-2.54)
  rect 7.5x10.5 smd: 4(3.85,0)
TYCO_1367073
  round 1 hole 1.55 unplated: (0,4.795) (0,-4.805)
  rect 2x0.5 smd: 1(-4.1,3.395) 2(-4.1,2.595) 3(-4.1,1.795) 4(-4.1,0.995) 5(-4.1,0.195) 6(-4.1,-0.605) 7(-4.1,-1.405) 8(-4.1,-2.205) 9(-4.1,-3.005) 10(-4.1,-3.805) 11(4.1,-3.405) 12(4.1,-2.605) 13(4.1,-1.805) 14(4.1,-1.005) 15(4.1,-0.205) 16(4.1,0.595) 17(4.1,1.395) 18(4.1,2.195) 19(4.1,2.995) 20(4.1,3.795)
unnamed
  rect 1.778x1.778 hole 1.067: (-30,0) (-25,-14.25) (-20,0) (-15,-14.25) (-10,0) (-5,-14.25) (5,-14.25) 21(-10,-5.68) 22(-10,-11.08) 23(-30,-8.58)
  round 1.676 hole 0.965: (-7.2,0) (-7.2,-14.25) (-2.5,0) (-2.5,-14.25) (2.5,0) (2.5,-14.25) (7.1,-2.33) (7.1,-7.13) (7.1,-11.93)
  rect 1.575x1.575 hole 0.864: (0,0)
  round 2.337 hole 1.626: (0.9,-2.32) (0.9,-11.92)
  rect 2x0.5 smd: 1(-3.2,-3.72) 2(-3.2,-4.52) 3(-3.2,-5.32) 4(-3.2,-6.12) 5(-3.2,-6.92) 6(-3.2,-7.72) 7(-3.2,-8.52) 8(-3.2,-9.32) 9(-3.2,-10.12) 10(-3.2,-10.92) 11(5,-10.52) 12(5,-9.72) 13(5,-8.92) 14(5,-8.12) 15(5,-7.32) 16(5,-6.52) 17(5,-5.72) 18(5,-4.92) 19(5,-4.12) 20(5,-3.32)
unnamed#2
  round 1 hole 1.55 unplated: (0.9,-2.33) (0.9,-11.93)
  rect 2x0.5 smd: 1(-3.2,-3.73) 2(-3.2,-4.53) 3(-3.2,-5.33) 4(-3.2,-6.13) 5(-3.2,-6.93) 6(-3.2,-7.73) 7(-3.2,-8.53) 8(-3.2,-9.33) 9(-3.2,-10.13) 10(-3.2,-10.93) 11(5,-10.53) 12(5,-9.73) 13(5,-8.93) 14(5,-8.13) 15(5,-7.33) 16(5,-6.53) 17(5,-5.73) 18(5,-4.93) 19(5,-4.13) 20(5,-3.33)
  round 1.45 hole 0.95: 21(7.1,-11.925) 22(7.1,-7.125) 23(7.1,-2.325) 24(2.5,0) 26(-2.5,0) 27(-7.2,0) 34(-7.2,-14.25) 36(-2.5,-14.25) 37(2.5,-14.25)
  round 1.35 hole 0.85: 25(0,0)
  round 1.55 hole 1.05: 28(-10,0) 29(-20,0) 30(-30,0) 31(-30,-8.58) 32(-25,-14.25) 33(-15,-14.25) 35(-5,-14.25) 38(5,-14.25) 39(-10,-11.08) 40(-10,-5.68)
unnamed#3
  round 1 hole 1.55 unplated: (12.375,4.795) (12.375,-4.805)
  rect 2x0.5 smd: 1(8.275,3.395) 2(8.275,2.595) 3(8.275,1.795) 4(8.275,0.995) 5(8.275,0.195) 6(8.275,-0.605) 7(8.275,-1.405) 8(8.275,-2.205) 9(8.275,-3.005) 10(8.275,-3.805) 11(16.475,-3.405) 12(16.475,-2.605) 13(16.475,-1.805) 14(16.475,-1.005) 15(16.475,-0.205) 16(16.475,0.595) 17(16.475,1.395) 18(16.475,2.195) 19(16.475,2.995) 20(16.475,3.795)
  round 1.45 hole 0.95: 21(18.575,-4.8) 22(18.575,0) 23(18.575,4.8) 24(13.975,7.125) 26(8.975,7.125) 27(4.275,7.125) 34(4.275,-7.125) 36(8.975,-7.125) 37(13.975,-7.125)
  round 1.35 hole 0.85: 25(11.475,7.125)
  round 1.55 hole 1.05: 28(1.475,7.125) 29(-8.525,7.125) 30(-18.525,7.125) 31(-18.525,-1.455) 32(-13.525,-7.125) 33(-3.525,-7.125) 35(6.475,-7.125) 38(16.475,-7.125) 39(1.475,-3.955) 40(1.475,1.445)

## Nets
AVDD: C29_1.2(B<0>) C54_1.2(B<0>) J1.147(A<146>) J1.148(A<147>) J1.149(A<148>) J1.150(A<149>) J1_1.6(A<5>) R5_1.2(B<0>) R6_1.2(B<0>) R7_1.2(B<0>) R8_1.2(B<0>) R9_1.2(B<0>) R10_1.2(B<0>) R11_1.2(B<0>) R12_1.2(B<0>) R13_1.2(B<0>) R14_1.2(B<0>) R15_1.2(B<0>) R16_1.2(B<0>) R17_1.2(B<0>) R20_1.2(B<0>) R22_1.2(B<0>) R25_1.2(B<0>) R27_1.2(B<0>) R28_1.2(B<0>) R30_1.2(B<0>) R32_1.2(B<0>) R34_1.2(B<0>) R36_1.2(B<0>) R42_1.2(B<0>) R46_1.1(A<0>) R47_1.1(A<0>) RG1_1.3(IN<1>) RG1_1.4(IN<2>)
DGND: IC10.D1(PGND<40>) IC10.D2(PGND<39>) IC10.D3(PGND<38>) IC10.D4(PGND<37>) IC10.D5(PGND<36>) IC10.D6(PGND<35>) IC10.D9(SGND<1>) IC10.E1(PGND<34>) IC10.E2(PGND<33>) IC10.E3(PGND<32>) IC10.E4(PGND<31>) IC10.E5(PGND<30>) IC10.E6(PGND<29>) IC10.E7(PGND<28>) IC10.E8(PGND<27>) IC10.F1(PGND<26>) IC10.F2(PGND<25>) IC10.F3(PGND<24>) IC10.F4(PGND<23>) IC10.F5(PGND<22>) IC10.F6(PGND<21>) IC10.F7(PGND<20>) IC10.F8(PGND<19>) IC10.F9(PGND<18>) IC10.G1(PGND<17>) IC10.G2(PGND<16>) IC10.G3(PGND<15>) IC10.G4(PGND<14>) IC10.G5(PGND<13>) IC10.G6(PGND<12>) IC10.G7(PGND<11>) IC10.G8(PGND<10>) IC10.G9(PGND<9>) IC10.G10(PGND<41>) IC10.G11(PGND<42>) IC10.H1(PGND<8>) IC10.H2(PGND<7>) IC10.H3(PGND<6>) IC10.H4(PGND<5>) IC10.H5(PGND<4>) IC10.H6(PGND<3>) IC10.H7(PGND<2>) IC10.H8(PGND<1>) IC10.H9(PGND<0>) IC10.H10(PGND<44>) IC10.H11(PGND<43>) IC10.H12(SGND<0>) IC10.M12(FCB) J2.A31(A<30>) J2.B31(B<30>) J2.C31(C<30>) J3.A2(A<1>) J3.B2(B<1>) J3.C2(C<1>) LC1.3(PSG)
GND: IC1.8
GND_SIGNAL: C1_1.2(B<0>) C2_1.1(A<0>) C3_1.1(A<0>) C4_1.1(A<0>) C5_1.1(A<0>) C6_1.1(A<0>) C7_1.1(A<0>) C8_1.1(A<0>) C9_1.1(A<0>) C10_1.1(A<0>) C11_1.1(A<0>) C12_1.1(A<0>) C13_1.1(A<0>) C14_1.1(A<0>) C15_1.1(A<0>) C16_1.1(A<0>) C17_1.1(A<0>) C18_1.1(A<0>) C19_1.1(A<0>) C20_1.1(A<0>) C21_1.1(A<0>) C22_1.1(A<0>) C23_1.1(A<0>) C24_1.1(A<0>) C25_1.1(A<0>) C26_1.1(A<0>) C27_1.1(A<0>) C28_1.1(A<0>) C30_1.1(A<0>) C31_1.1(A<0>) C32_1.1(A<0>) C33_1.1(A<0>) C34_1.1(A<0>) C35_1.1(A<0>) C36_1.1(A<0>) C37_1.1(A<0>) C38_1.1(A<0>) C39_1.1(A<0>) C40_1.1(A<0>) C41_1.1(A<0>) C42_1.1(A<0>) C43_1.1(A<0>) C44_1.1(A<0>) C45_1.1(A<0>) C46_1.1(A<0>) C47_1.1(A<0>) C48_1.2(B<0>) C50_1.1(A<0>) C51_1.1(A<0>) C52_1.1(A<0>) C53_1.1(A<0>) C54_1.1(A<0>) D1_1.1(K<0>) IC2.1 IC3.1 IC4.1 IC5.1 IC6.1 IC7.1 IC8.5 IC9.8(VDD) J1.1(A<0>) J1.4(A<3>) J1.5(A<4>) J1.8(A<7>) J1.9(A<8>) J1.12(A<11>) J1.13(A<12>) J1.16(A<15>) J1.17(A<16>) J1.20(A<19>) J1.21(A<20>) J1.24(A<23>) J1.25(A<24>) J1.28(A<27>) J1.29(A<28>) J1.32(A<31>) J1.33(A<32>) J1.36(A<35>) J1.37(A<36>) J1.40(A<39>) J1.41(A<40>) J1.44(A<43>) J1.45(A<44>) J1.48(A<47>) J1.49(A<48>) J1.52(A<51>) J1.53(A<52>) J1.56(A<55>) J1.57(A<56>) J1.60(A<59>) J1.61(A<60>) J1.64(A<63>) J1.65(A<64>) J1.68(A<67>) J1.69(A<68>) J1.72(A<71>) J1.73(A<72>) J1.76(A<75>) J1.77(A<76>) J1.80(A<79>) J1.81(A<80>) J1.84(A<83>) J1.85(A<84>) J1.88(A<87>) J1.89(A<88>) J1.92(A<91>) J1.93(A<92>) J1.96(A<95>) J1.97(A<96>) J1.100(A<99>) J1.101(A<100>) J1.104(A<103>) J1.105(A<104>) J1.108(A<107>) J1.109(A<108>) J1.112(A<111>) J1.113(A<112>) J1.116(A<115>) J1.117(A<116>) J1.120(A<119>) J1.121(A<120>) J1.124(A<123>) J1.125(A<124>) J1.128(A<127>) J1.129(A<128>) J1.132(A<131>) J1.133(A<132>) J1.136(A<135>) J1.137(A<136>) J1.140(A<139>) J1.141(A<140>) J1.144(A<143>) J1.145(A<144>) J1.146(A<145>) J1_1.2(A<1>) J1_1.4(A<3>) J1_1.5(A<4>) J2.A3(A<2>) J2.A6(A<5>) J2.A9(A<8>) J2.A12(A<11>) J2.A15(A<14>) J2.A18(A<17>) J2.A21(A<20>) J2.A24(A<23>) J2.A27(A<26>) J2.A30(A<29>) J2.B1(B<0>) J2.B2(B<1>) J2.B3(B<2>) J2.B4(B<3>) J2.B5(B<4>) J2.B6(B<5>) J2.B7(B<6>) J2.B8(B<7>) J2.B9(B<8>) J2.B10(B<9>) J2.B11(B<10>) J2.B12(B<11>) J2.B13(B<12>) J2.B14(B<13>) J2.B15(B<14>) J2.B16(B<15>) J2.B17(B<16>) J2.B18(B<17>) J2.B19(B<18>) J2.B20(B<19>) J2.B21(B<20>) J2.B22(B<21>) J2.B23(B<22>) J2.B24(B<23>) J2.B25(B<24>) J2.B26(B<25>) J2.B29(B<28>) J2.B30(B<29>) J2.C3(C<2>) J2.C6(C<5>) J2.C9(C<8>) J2.C12(C<11>) J2.C15(C<14>) J2.C18(C<17>) J2.C21(C<20>) J2.C24(C<23>) J2.C27(C<26>) J2.C30(C<29>) J3.B3(B<2>) J3.B4(B<3>) J3.B7(B<6>) J3.B8(B<7>) J3.B9(B<8>) J3.B10(B<9>) J3.B11(B<10>) J3.B12(B<11>) J3.B13(B<12>) J3.B14(B<13>) J3.B15(B<14>) J3.B16(B<15>) J3.B17(B<16>) J3.B18(B<17>) J3.B19(B<18>) J3.B20(B<19>) J3.B21(B<20>) J3.B22(B<21>) J3.B23(B<22>) J3.B24(B<23>) J3.B25(B<24>) J3.B26(B<25>) J3.B27(B<26>) J3.B28(B<27>) J3.B29(B<28>) J3.B30(B<29>) J3.B31(B<30>) J3.B32(B<31>) J3.C3(C<2>) J3.C6(C<5>) J3.C9(C<8>) J3.C12(C<11>) J3.C15(C<14>) J3.C18(C<17>) J3.C21(C<20>) J3.C24(C<23>) J3.C27(C<26>) J3.C30(C<29>) J3_1.1(A<0>) J4.8 J4.9 J4.10 J4.11 J4_1.3(A<2>) J5.8 J5.9 J5.10 J5.11 J6.1(VEET1) J6.9(VEER/RS1) J6.10(VEER1) J6.11(VEER2) J6.14(VEER3) J6.17(VEET2) J6.20(VEET3) J7.1(VEET1) J7.9(VEER/RS1) J7.10(VEER1) J7.11(VEER2) J7.14(VEER3) J7.17(VEET2) J7.20(VEET3) LC1.4(CG<0>) LC1.5(CG<1>) LC1.6(CG<2>) LK30_1.1(A<0>) LK55_1.1(A<0>) R21_1.1(A<0>) R23_1.1(A<0>) R26_1.1(A<0>) R29_1.1(A<0>) R31_1.1(A<0>) R33_1.1(A<0>) R35_1.1(A<0>) R37_1.1(A<0>) RG1.4 RG1.9 RG1.10 RG1.11 RG1.12 RG1.13 RG1.14 RG1.20 RG1.25(VO2) RG1.26 RG1.29 RG1_1.1(GND) RG1_1.2(EN*) U1_1.30(GND_PA2) U1_1.63(GND_PA) U1_1.65(VSSA) U1_1.73(GND_NMOS) U1_1.77(GND_W) U1_1.85(GND_DAC) U1_1.92(E_FSU) U1_1.98(GND_WILK) U1_1.102(VSSA2) U1_1.103(VSSM) U1_1.109(GND_DISCRI) U1_1.111(VSSD) U1_1.112(GNDD) U1_1.150(VSSD2) U1_1.183(GNDD2) U1_1.189(VSSD3) U1_1.195(GND_DISCRI2) U1_1.197(VSSM2) U1_1.198(VSS) U1_1.202(GND_FSU) U1_1.206(GND_FSB1) U1_1.211(GND_FSB0) U1_1.217(GND_CAPA) U1_1.219(GND_SS) U1_1.227(GND_OTAG) U1_1.231(GND_NMOS2) U1_1.235(VSSI) U1_1.237(GND_PA3)
P1V2: RG1.15(OUT0) RG1.16(OUT1) RG1.17(OUT2) RG1.18(OUT3) RG1.19(SENSE)
P1V5: IC10.G12(PGOOD) IC10.J1(VOUT<42>) IC10.J2(VOUT<41>) IC10.J3(VOUT<40>) IC10.J4(VOUT<39>) IC10.J5(VOUT<38>) IC10.J6(VOUT<37>) IC10.J7(VOUT<36>) IC10.J8(VOUT<35>) IC10.J9(VOUT<34>) IC10.J10(VOUT<33>) IC10.J11(VOUT<43>) IC10.K1(VOUT<32>) IC10.K2(VOUT<31>) IC10.K3(VOUT<30>) IC10.K4(VOUT<29>) IC10.K5(VOUT<28>) IC10.K6(VOUT<27>) IC10.K7(VOUT<26>) IC10.K8(VOUT<25>) IC10.K9(VOUT<24>) IC10.K10(VOUT<23>) IC10.K11(VOUT<22>) IC10.L1(VOUT<21>) IC10.L2(VOUT<20>) IC10.L3(VOUT<19>) IC10.L4(VOUT<18>) IC10.L5(VOUT<17>) IC10.L6(VOUT<16>) IC10.L7(VOUT<15>) IC10.L8(VOUT<14>) IC10.L9(VOUT<13>) IC10.L10(VOUT<12>) IC10.L11(VOUT<11>) IC10.M1(VOUT<10>) IC10.M2(VOUT<9>) IC10.M3(VOUT<8>) IC10.M4(VOUT<7>) IC10.M5(VOUT<6>) IC10.M6(VOUT<5>) IC10.M7(VOUT<4>) IC10.M8(VOUT<3>) IC10.M9(VOUT<2>) IC10.M10(VOUT<1>) IC10.M11(VOUT<0>) LC1.1(B)
P2V5: RG1.23(VO0) RG1.24(VO1) RG1.27(BIAS) RG1.28(EN)
P3V3D: IC2.5 IC3.5 IC4.5 IC5.5 IC5.8(EN) IC6.5 IC6.8(EN) IC7.5 IC7.8(EN) IC9.4(GND) L1.1(A<0>) L2.2(B<0>) L3.1(A<0>) L4.2(B<0>)
P12V: IC10.A1(VIN<17>) IC10.A2(VIN<16>) IC10.A3(VIN<15>) IC10.A4(VIN<14>) IC10.A5(VIN<13>) IC10.A6(VIN<12>) IC10.B1(VIN<11>) IC10.B2(VIN<10>) IC10.B3(VIN<9>) IC10.B4(VIN<8>) IC10.B5(VIN<7>) IC10.B6(VIN<6>) IC10.C1(VIN<5>) IC10.C2(VIN<4>) IC10.C3(VIN<3>) IC10.C4(VIN<2>) IC10.C5(VIN<1>) IC10.C6(VIN<0>) J2.A32(A<31>) J2.B32(B<31>) J2.C32(C<31>) J3.A1(A<0>) J3.B1(B<0>) J3.C1(C<0>)
PV3VD: IC8.8
VDD: IC1.1
VDD_BUF1_1: C7_1.2(B<0>) LK7_1.1(A<0>) R9_1.1(A<0>) U1_1.223(VDD_BUF1)
VDD_DAC_1: C3_1.2(B<0>) LK3_1.1(A<0>) R5_1.1(A<0>) U1_1.87(VDD_DAC)
VDD_DISCRI_1: C14_1.2(B<0>) LK14_1.1(A<0>) R15_1.1(A<0>) U1_1.105(VDD_DISCRI)
VDD_DISCRIADC_1: C15_1.2(B<0>) C17_1.2(B<0>) LK15_1.1(A<0>) R16_1.1(A<0>) U1_1.107(VDD_DISCRIADC) U1_1.193(VDD_DISCRIADC2)
VDD_FSB_1: C12_1.2(B<0>) LK10_1.1(A<0>) R13_1.1(A<0>) U1_1.210(VDD_FSB)
VDD_FSU1_1: C13_1.2(B<0>) LK11_1.1(A<0>) R14_1.1(A<0>) U1_1.90(VDD_FSU1)
VDD_FSU2_1: C16_1.2(B<0>) LK13_1.1(A<0>) R17_1.1(A<0>) U1_1.204(VDD_FSU2)
VDD_OTAG_1: C5_1.2(B<0>) LK5_1.1(A<0>) R7_1.1(A<0>) U1_1.225(VDD_OTAG)
VDD_PA_1: C6_1.2(B<0>) C8_1.2(B<0>) LK6_1.1(A<0>) R8_1.1(A<0>) U1_1.67(VDD_PA) U1_1.233(VDD_PA2)
VDD_PAD_1: C4_1.2(B<0>) LK4_1.1(A<0>) R6_1.1(A<0>) U1_1.236(VDD_PAD)
VDD_SS_1: C10_1.2(B<0>) LK9_1.1(A<0>) R11_1.1(A<0>) U1_1.221(VDD_SS)
VDD_W_1: C9_1.2(B<0>) LK8_1.1(A<0>) R10_1.1(A<0>) U1_1.83(VDD_W)
VDD_WILK_1: C11_1.2(B<0>) LK12_1.1(A<0>) R12_1.1(A<0>) U1_1.100(VDD_WILK)
VDDD2_1: C2_1.2(B<0>) LK2_1.1(A<0>) R4_1.2(B<0>) U1_1.113(VDDD2)
VDDD_1: C1_1.1(A<0>) LK1_1.1(A<0>) R3_1.2(B<0>) U1_1.185(VDDD)
ADC_DAV_1: LK54_1.1(A<0>) R18_1.1(A<0>)
ANALOG_TO_MAROC<0>: J1.2(A<1>) U1_1.238(IN0)
ANALOG_TO_MAROC<1>: J1.3(A<2>) U1_1.239(IN1)
ANALOG_TO_MAROC<2>: J1.6(A<5>) U1_1.240(IN2)
ANALOG_TO_MAROC<3>: J1.7(A<6>) U1_1.1(IN3)
ANALOG_TO_MAROC<4>: J1.10(A<9>) U1_1.2(IN4)
ANALOG_TO_MAROC<5>: J1.11(A<10>) U1_1.3(IN5)
ANALOG_TO_MAROC<6>: J1.14(A<13>) U1_1.4(IN6)
ANALOG_TO_MAROC<7>: J1.15(A<14>) U1_1.5(IN7)
ANALOG_TO_MAROC<8>: J1.18(A<17>) U1_1.6(IN8)
ANALOG_TO_MAROC<9>: J1.19(A<18>) U1_1.7(IN9)
ANALOG_TO_MAROC<10>: J1.22(A<21>) U1_1.8(IN10)
ANALOG_TO_MAROC<11>: J1.23(A<22>) U1_1.9(IN11)
ANALOG_TO_MAROC<12>: J1.26(A<25>) U1_1.10(IN12)
ANALOG_TO_MAROC<13>: J1.27(A<26>) U1_1.11(IN13)
ANALOG_TO_MAROC<14>: J1.30(A<29>) U1_1.12(IN14)
ANALOG_TO_MAROC<15>: J1.31(A<30>) U1_1.13(IN15)
ANALOG_TO_MAROC<16>: J1.34(A<33>) U1_1.14(IN16)
ANALOG_TO_MAROC<17>: J1.35(A<34>) U1_1.15(IN17)
ANALOG_TO_MAROC<18>: J1.38(A<37>) U1_1.16(IN18)
ANALOG_TO_MAROC<19>: J1.39(A<38>) U1_1.17(IN19)
ANALOG_TO_MAROC<20>: J1.42(A<41>) U1_1.18(IN20)
ANALOG_TO_MAROC<21>: J1.43(A<42>) U1_1.19(IN21)
ANALOG_TO_MAROC<22>: J1.46(A<45>) U1_1.20(IN22)
ANALOG_TO_MAROC<23>: J1.47(A<46>) U1_1.21(IN23)
ANALOG_TO_MAROC<24>: J1.50(A<49>) U1_1.22(IN24)
ANALOG_TO_MAROC<25>: J1.51(A<50>) U1_1.23(IN25)
ANALOG_TO_MAROC<26>: J1.54(A<53>) U1_1.24(IN26)
ANALOG_TO_MAROC<27>: J1.55(A<54>) U1_1.25(IN27)
ANALOG_TO_MAROC<28>: J1.58(A<57>) U1_1.26(IN28)
ANALOG_TO_MAROC<29>: J1.59(A<58>) U1_1.27(IN29)
ANALOG_TO_MAROC<30>: J1.62(A<61>) U1_1.28(IN30)
ANALOG_TO_MAROC<31>: J1.63(A<62>) U1_1.29(IN31)
ANALOG_TO_MAROC<32>: J1.66(A<65>) U1_1.31(IN32)
ANALOG_TO_MAROC<33>: J1.67(A<66>) U1_1.32(IN33)
ANALOG_TO_MAROC<34>: J1.70(A<69>) U1_1.33(IN34)
ANALOG_TO_MAROC<35>: J1.71(A<70>) U1_1.34(IN35)
ANALOG_TO_MAROC<36>: J1.74(A<73>) U1_1.35(IN36)
ANALOG_TO_MAROC<37>: J1.75(A<74>) U1_1.36(IN37)
ANALOG_TO_MAROC<38>: J1.78(A<77>) U1_1.37(IN38)
ANALOG_TO_MAROC<39>: J1.79(A<78>) U1_1.38(IN39)
ANALOG_TO_MAROC<40>: J1.82(A<81>) U1_1.39(IN40)
ANALOG_TO_MAROC<41>: J1.83(A<82>) U1_1.40(IN41)
ANALOG_TO_MAROC<42>: J1.86(A<85>) U1_1.41(IN42)
ANALOG_TO_MAROC<43>: J1.87(A<86>) U1_1.42(IN43)
ANALOG_TO_MAROC<44>: J1.90(A<89>) U1_1.43(IN44)
ANALOG_TO_MAROC<45>: J1.91(A<90>) U1_1.44(IN45)
ANALOG_TO_MAROC<46>: J1.94(A<93>) U1_1.45(IN46)
ANALOG_TO_MAROC<47>: J1.95(A<94>) U1_1.46(IN47)
ANALOG_TO_MAROC<48>: J1.98(A<97>) U1_1.47(IN48)
ANALOG_TO_MAROC<49>: J1.99(A<98>) U1_1.48(IN49)
ANALOG_TO_MAROC<50>: J1.102(A<101>) U1_1.49(IN50)
ANALOG_TO_MAROC<51>: J1.103(A<102>) U1_1.50(IN51)
ANALOG_TO_MAROC<52>: J1.106(A<105>) U1_1.51(IN52)
ANALOG_TO_MAROC<53>: J1.107(A<106>) U1_1.52(IN53)
ANALOG_TO_MAROC<54>: J1.110(A<109>) U1_1.53(IN54)
ANALOG_TO_MAROC<55>: J1.111(A<110>) U1_1.54(IN55)
ANALOG_TO_MAROC<56>: J1.114(A<113>) U1_1.55(IN56)
ANALOG_TO_MAROC<57>: J1.115(A<114>) U1_1.56(IN57)
ANALOG_TO_MAROC<58>: J1.118(A<117>) U1_1.57(IN58)
ANALOG_TO_MAROC<59>: J1.119(A<118>) U1_1.58(IN59)
ANALOG_TO_MAROC<60>: J1.122(A<121>) U1_1.59(IN60)
ANALOG_TO_MAROC<61>: J1.123(A<122>) U1_1.60(IN61)
ANALOG_TO_MAROC<62>: J1.126(A<125>) U1_1.61(IN62)
ANALOG_TO_MAROC<63>: J1.127(A<126>) U1_1.62(IN63)
CK_40M_1: J3_1.2(A<1>) R24_1.1(A<0>) U1_1.188(CK_40M)
CK_R_1: LK64_1.1(A<0>) U1_1.78(CK_R)
CK_SC_1: LK57_1.1(A<0>) U1_1.68(CK_SC)
CKB_40M_1: J3_1.3(A<2>) R24_1.2(B<0>) U1_1.186(CKB_40M)
CTEST_1: J4_1.1(A<0>)
D_R_1: LK67_1.1(A<0>) U1_1.82(D_R)
D_SC_1: LK60_1.1(A<0>) U1_1.64(D_SC)
DBOARD_MISO: J1.131(A<130>)
DBOARD_MISO*: J1.135(A<134>)
DBOARD_MOSI: J1.138(A<137>)
DBOARD_MOSI*: J1.142(A<141>)
DBOARD_SCLK: J1.130(A<129>)
DBOARD_SCLK*: J1.134(A<133>)
DBOARD_SSN: J1.139(A<138>)
DBOARD_SSN*: J1.143(A<142>)
EN_OTAG_1: LK58_1.1(A<0>) U1_1.213(EN_OTAG)
ENABLE_CLK_IN_DRIVE: IC3.8(EN)
ENABLE_CLK_OUT_DRIVE: IC4.8(EN)
ENABLE_GLOBALTRIG_DRIVE: IC2.8(EN)
G_DIODE_1: C27_1.2(B<0>) LK25_1.1(A<0>) U1_1.91(G_DIODE)
HOLD1_1: LK62_1.1(A<0>) U1_1.79(HOLD1)
HOLD2_1: LK65_1.1(A<0>) U1_1.81(HOLD2)
IB_INTEG_1: C41_1.2(B<0>) LK44_1.1(A<0>) U1_1.101(IB_INTEG)
IB_SUM_1: C35_1.2(B<0>) LK38_1.1(A<0>) U1_1.212(IB_SUM)
IB_W_1: C31_1.2(B<0>) LK34_1.1(A<0>) U1_1.209(IB_W)
IBI_BUF_1: C28_1.2(B<0>) LK31_1.1(A<0>) U1_1.74(IBI_BUF)
IBI_SS_1: C32_1.2(B<0>) LK35_1.1(A<0>) U1_1.70(IBI_SS)
IBO_DAC_1: C40_1.2(B<0>) LK43_1.1(A<0>) U1_1.84(IBO_DAC)
IBO_SS_1: C36_1.2(B<0>) LK39_1.1(A<0>) U1_1.72(IBO_SS)
IREF_DAC_1: C24_1.2(B<0>) LK22_1.1(A<0>) R25_1.1(A<0>) R26_1.2(B<0>) U1_1.86(IREF_DAC)
LVDS_CLK_IN_FROM_FPGA_N: IC3.2(IN-)
LVDS_CLK_IN_FROM_FPGA_P: IC3.3(IN+)
LVDS_CLK_IN_TO_FPGA_N: IC6.7(OUTM*)
LVDS_CLK_IN_TO_FPGA_P: IC6.6(OUTP)
LVDS_CLK_OUT_FROM_FPGA_N: IC4.2(IN-)
LVDS_CLK_OUT_FROM_FPGA_P: IC4.3(IN+)
LVDS_CLK_OUT_TO_FPGA_N: IC7.7(OUTM*)
LVDS_CLK_OUT_TO_FPGA_P: IC7.6(OUTP)
LVDS_DIN_CLK_N: J2.C2(C<1>)
LVDS_DIN_CLK_P: J2.C1(C<0>)
LVDS_DIN_N<0>: J2.A2(A<1>)
LVDS_DIN_N<1>: J2.C5(C<4>)
LVDS_DIN_N<2>: J2.A5(A<4>)
LVDS_DIN_N<3>: J2.C8(C<7>)
LVDS_DIN_N<4>: J2.A8(A<7>)
LVDS_DIN_N<5>: J2.C11(C<10>)
LVDS_DIN_N<6>: J2.A11(A<10>)
LVDS_DIN_N<7>: J2.C14(C<13>)
LVDS_DIN_N<8>: J2.A14(A<13>)
LVDS_DIN_N<9>: J2.C17(C<16>)
LVDS_DIN_N<10>: J2.A17(A<16>)
LVDS_DIN_N<11>: J2.C20(C<19>)
LVDS_DIN_N<12>: J2.A20(A<19>)
LVDS_DIN_N<13>: J2.C23(C<22>)
LVDS_DIN_N<14>: J2.A23(A<22>)
LVDS_DIN_N<15>: J2.C26(C<25>)
LVDS_DIN_P<0>: J2.A1(A<0>)
LVDS_DIN_P<1>: J2.C4(C<3>)
LVDS_DIN_P<2>: J2.A4(A<3>)
LVDS_DIN_P<3>: J2.C7(C<6>)
LVDS_DIN_P<4>: J2.A7(A<6>)
LVDS_DIN_P<5>: J2.C10(C<9>)
LVDS_DIN_P<6>: J2.A10(A<9>)
LVDS_DIN_P<7>: J2.C13(C<12>)
LVDS_DIN_P<8>: J2.A13(A<12>)
LVDS_DIN_P<9>: J2.C16(C<15>)
LVDS_DIN_P<10>: J2.A16(A<15>)
LVDS_DIN_P<11>: J2.C19(C<18>)
LVDS_DIN_P<12>: J2.A19(A<18>)
LVDS_DIN_P<13>: J2.C22(C<21>)
LVDS_DIN_P<14>: J2.A22(A<21>)
LVDS_DIN_P<15>: J2.C25(C<24>)
LVDS_DOUT_CLK_N: J3.C31(C<30>)
LVDS_DOUT_CLK_P: J3.C32(C<31>)
LVDS_DOUT_N<0>: J3.A31(A<30>)
LVDS_DOUT_N<1>: J3.C28(C<27>)
LVDS_DOUT_N<2>: J3.A28(A<27>)
LVDS_DOUT_N<3>: J3.C25(C<24>)
LVDS_DOUT_N<4>: J3.A25(A<24>)
LVDS_DOUT_N<5>: J3.C22(C<21>)
LVDS_DOUT_N<6>: J3.A22(A<21>)
LVDS_DOUT_N<7>: J3.C19(C<18>)
LVDS_DOUT_N<8>: J3.A19(A<18>)
LVDS_DOUT_N<9>: J3.C16(C<15>)
LVDS_DOUT_N<10>: J3.A16(A<15>)
LVDS_DOUT_N<11>: J3.C13(C<12>)
LVDS_DOUT_N<12>: J3.A13(A<12>)
LVDS_DOUT_N<13>: J3.C10(C<9>)
LVDS_DOUT_N<14>: J3.A10(A<9>)
LVDS_DOUT_N<15>: J3.C7(C<6>)
LVDS_DOUT_P<0>: J3.A32(A<31>)
LVDS_DOUT_P<1>: J3.C29(C<28>)
LVDS_DOUT_P<2>: J3.A29(A<28>)
LVDS_DOUT_P<3>: J3.C26(C<25>)
LVDS_DOUT_P<4>: J3.A26(A<25>)
LVDS_DOUT_P<5>: J3.C23(C<22>)
LVDS_DOUT_P<6>: J3.A23(A<22>)
LVDS_DOUT_P<7>: J3.C20(C<19>)
LVDS_DOUT_P<8>: J3.A20(A<19>)
LVDS_DOUT_P<9>: J3.C17(C<16>)
LVDS_DOUT_P<10>: J3.A17(A<16>)
LVDS_DOUT_P<11>: J3.C14(C<13>)
LVDS_DOUT_P<12>: J3.A14(A<13>)
LVDS_DOUT_P<13>: J3.C11(C<10>)
LVDS_DOUT_P<14>: J3.A11(A<10>)
LVDS_DOUT_P<15>: J3.C8(C<7>)
LVDS_GLOBALTRIG_FROM_FPGA_N: IC2.2(IN-)
LVDS_GLOBALTRIG_FROM_FPGA_P: IC2.3(IN+)
LVDS_GLOBALTRIG_TO_FPGA_N: IC5.7(OUTM*)
LVDS_GLOBALTRIG_TO_FPGA_P: IC5.6(OUTP)
LVDS_TRIG_FROM_FPGA_N: IC8.2(D*<0>)
LVDS_TRIG_FROM_FPGA_P: IC8.1(D<0>)
LVPECL_TRIG_IN_N: IC8.4(D*<0>) J2.A26(A<25>)
LVPECL_TRIG_IN_P: IC8.3(D<0>) J2.A25(A<24>)
LVPECL_TRIG_OUT_N: IC8.6(Q*) J3.A7(A<6>)
LVPECL_TRIG_OUT_P: IC8.7(Q) J3.A8(A<7>)
MLVDS_CLK_IN_N: IC3.7(OUT-) IC6.2(INM*) J2.B28(B<27>) J3.B5(B<4>)
MLVDS_CLK_IN_P: IC3.6(OUT+) IC6.3(INP) J2.B27(B<26>) J3.B6(B<5>)
MLVDS_CLK_OUT_N: IC4.7(OUT-) IC7.2(INM*) J2.A29(A<28>) J3.A4(A<3>)
MLVDS_CLK_OUT_P: IC4.6(OUT+) IC7.3(INP) J2.A28(A<27>) J3.A5(A<4>)
MLVDS_GLOBALTRIG_N: IC2.7(OUT-) IC5.2(INM*) J2.C29(C<28>) J3.C4(C<3>)
MLVDS_GLOBALTRIG_P: IC2.6(OUT+) IC5.3(INP) J2.C28(C<27>) J3.C5(C<4>)
ONE_WIRE: IC9.1(DQ)
OR<0>_1: LK51_1.1(A<0>) R1_1.2(B<0>)
OR<1>_1: LK52_1.1(A<0>) R2_1.2(B<0>)
OUT_ADC_1: LK56_1.1(A<0>) R19_1.1(A<0>)
OUT_FS_1: J1_1.3(A<2>) U1_1.201(OUT_FS)
OUT_Q_1: J1_1.1(A<0>) U1_1.215(OUT_Q)
P1: J1.151 J1.152 J1.153 J1.154
P2: J1.155 J1.156 J1.157 J1.158
P3: J1.159 J1.160 J1.161 J1.162
PWR_ON_1: R27_1.1(A<0>) U1_1.110(PWR_ON)
QBUF_R_1: LK61_1.1(A<0>) U1_1.76(QBUF_R)
QBUF_SC_1: LK63_1.1(A<0>) U1_1.199(QBUF_SC)
RAMP_1: LK27_1.1(A<0>) U1_1.97(RAMP)
RSTB_R_1: LK53_1.1(A<0>) U1_1.80(RSTB_R)
RSTN_ADC_1: LK68_1.1(A<0>) U1_1.184(RSTN_ADC)
RSTN_SC_1: LK66_1.1(A<0>) U1_1.66(RSTN_SC)
SFP0_LOS: J6.8(LOS)
SFP0_MOD_DEF0: J6.4(MOD_DEF2/SDA) J6.5(MOD_DEF1/SCL) J6.6(MOD_DEF0/MOD_ABS)
SFP0_RATE_SELECT: J6.7(RATE_SELECT/RS0)
SFP0_RX_N: J6.12(RD-)
SFP0_RX_P: J6.13(RD+)
SFP0_TX_DISABLE: J6.3(TX_DISABLE)
SFP0_TX_FAULT: J6.2(TX_FAULT)
SFP0_TX_N: J6.19(TD-)
SFP0_TX_P: J6.18(TD+)
SFP1_LOS: J7.8(LOS)
SFP1_MOD_DEF0: J7.4(MOD_DEF2/SDA) J7.5(MOD_DEF1/SCL) J7.6(MOD_DEF0/MOD_ABS)
SFP1_RATE_SELECT: J7.7(RATE_SELECT/RS0)
SFP1_RX_N: J7.12(RD-)
SFP1_RX_P: J7.13(RD+)
SFP1_TX_DISABLE: J7.3(TX_DISABLE)
SFP1_TX_FAULT: J7.2(TX_FAULT)
SFP1_TX_N: J7.19(TD-)
SFP1_TX_P: J7.18(TD+)
START_ADCB_1: LK59_1.1(A<0>) U1_1.116(START_ADCB)
SUM<1>_1: U1_1.228(SUM1)
SUM<2>_1: U1_1.226(SUM2)
SUM<3>_1: U1_1.224(SUM3)
SUM<4>_1: U1_1.222(SUM4)
SUM<5>_1: U1_1.220(SUM5)
SUM<6>_1: U1_1.218(SUM6)
SUM<7>_1: U1_1.216(SUM7)
SUM<8>_1: U1_1.214(SUM8)
TRIG<0>_1: LK26_1.1(A<0>) U1_1.182(OUT0)
TRIG<1>_1: U1_1.181(OUT1)
TRIG<2>_1: U1_1.180(OUT2)
TRIG<3>_1: U1_1.179(OUT3)
TRIG<4>_1: U1_1.178(OUT4)
TRIG<5>_1: U1_1.177(OUT5)
TRIG<6>_1: U1_1.176(OUT6)
TRIG<7>_1: U1_1.175(OUT7)
TRIG<8>_1: U1_1.174(OUT8)
TRIG<9>_1: U1_1.173(OUT9)
TRIG<10>_1: U1_1.172(OUT10)
TRIG<11>_1: U1_1.171(OUT11)
TRIG<12>_1: U1_1.170(OUT12)
TRIG<13>_1: U1_1.169(OUT13)
TRIG<14>_1: U1_1.168(OUT14)
TRIG<15>_1: U1_1.167(OUT15)
TRIG<16>_1: U1_1.166(OUT16)
TRIG<17>_1: U1_1.165(OUT17)
TRIG<18>_1: U1_1.164(OUT18)
TRIG<19>_1: U1_1.163(OUT19)
TRIG<20>_1: U1_1.162(OUT20)
TRIG<21>_1: U1_1.161(OUT21)
TRIG<22>_1: U1_1.160(OUT22)
TRIG<23>_1: U1_1.159(OUT23)
TRIG<24>_1: U1_1.158(OUT24)
TRIG<25>_1: U1_1.157(OUT25)
TRIG<26>_1: U1_1.156(OUT26)
TRIG<27>_1: U1_1.155(OUT27)
TRIG<28>_1: U1_1.154(OUT28)
TRIG<29>_1: U1_1.153(OUT29)
TRIG<30>_1: U1_1.152(OUT30)
TRIG<31>_1: U1_1.151(OUT31)
